# EAGLE board badge2 - multi (EAGLE 8.7.0), part 1 of 5
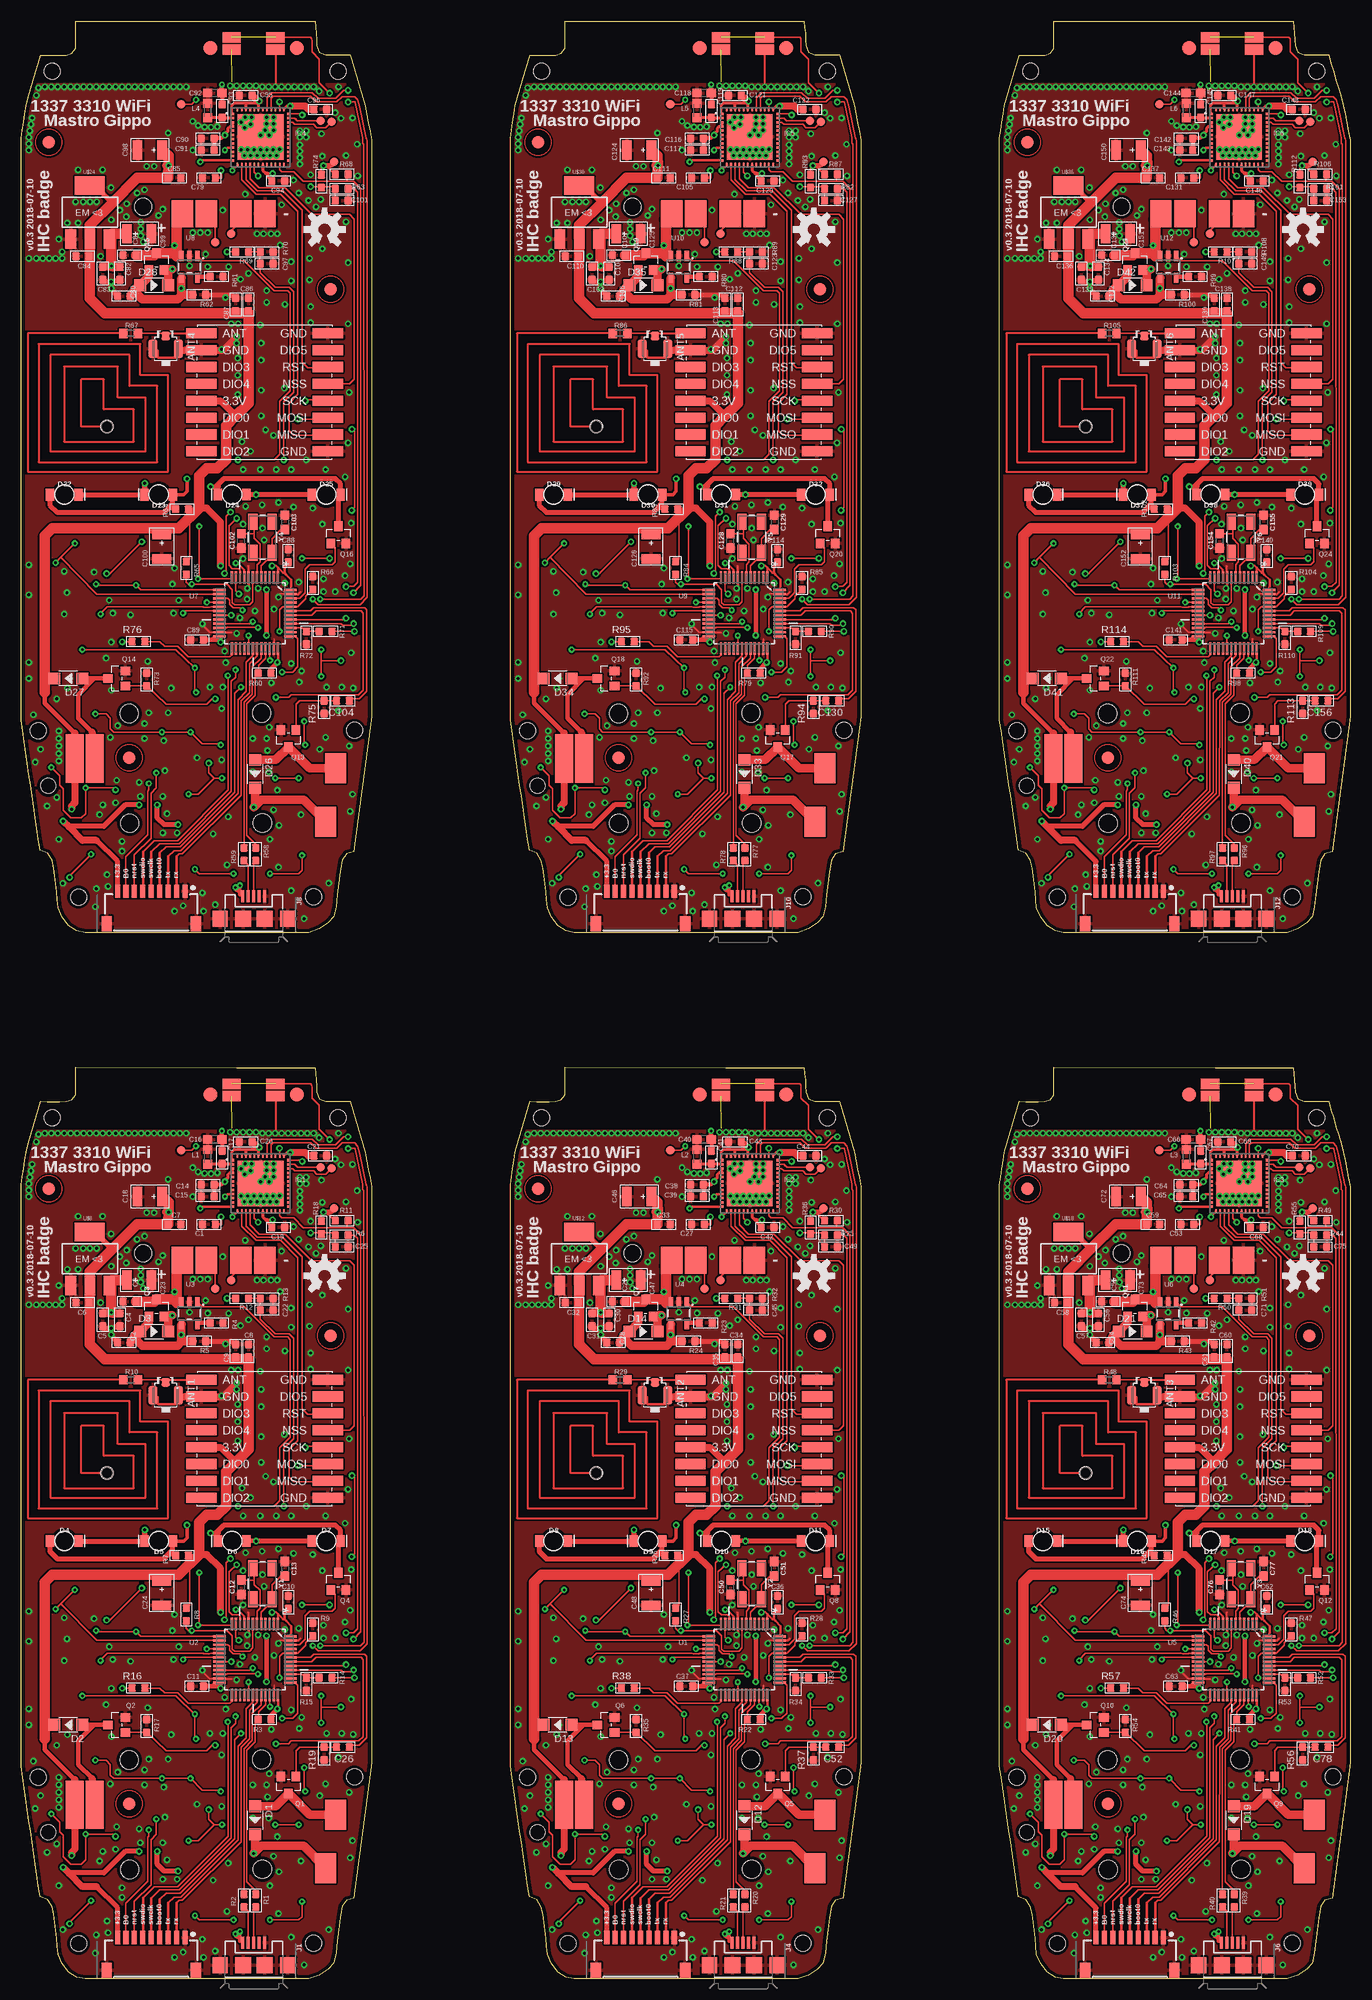
[diagram p0: board, top side]
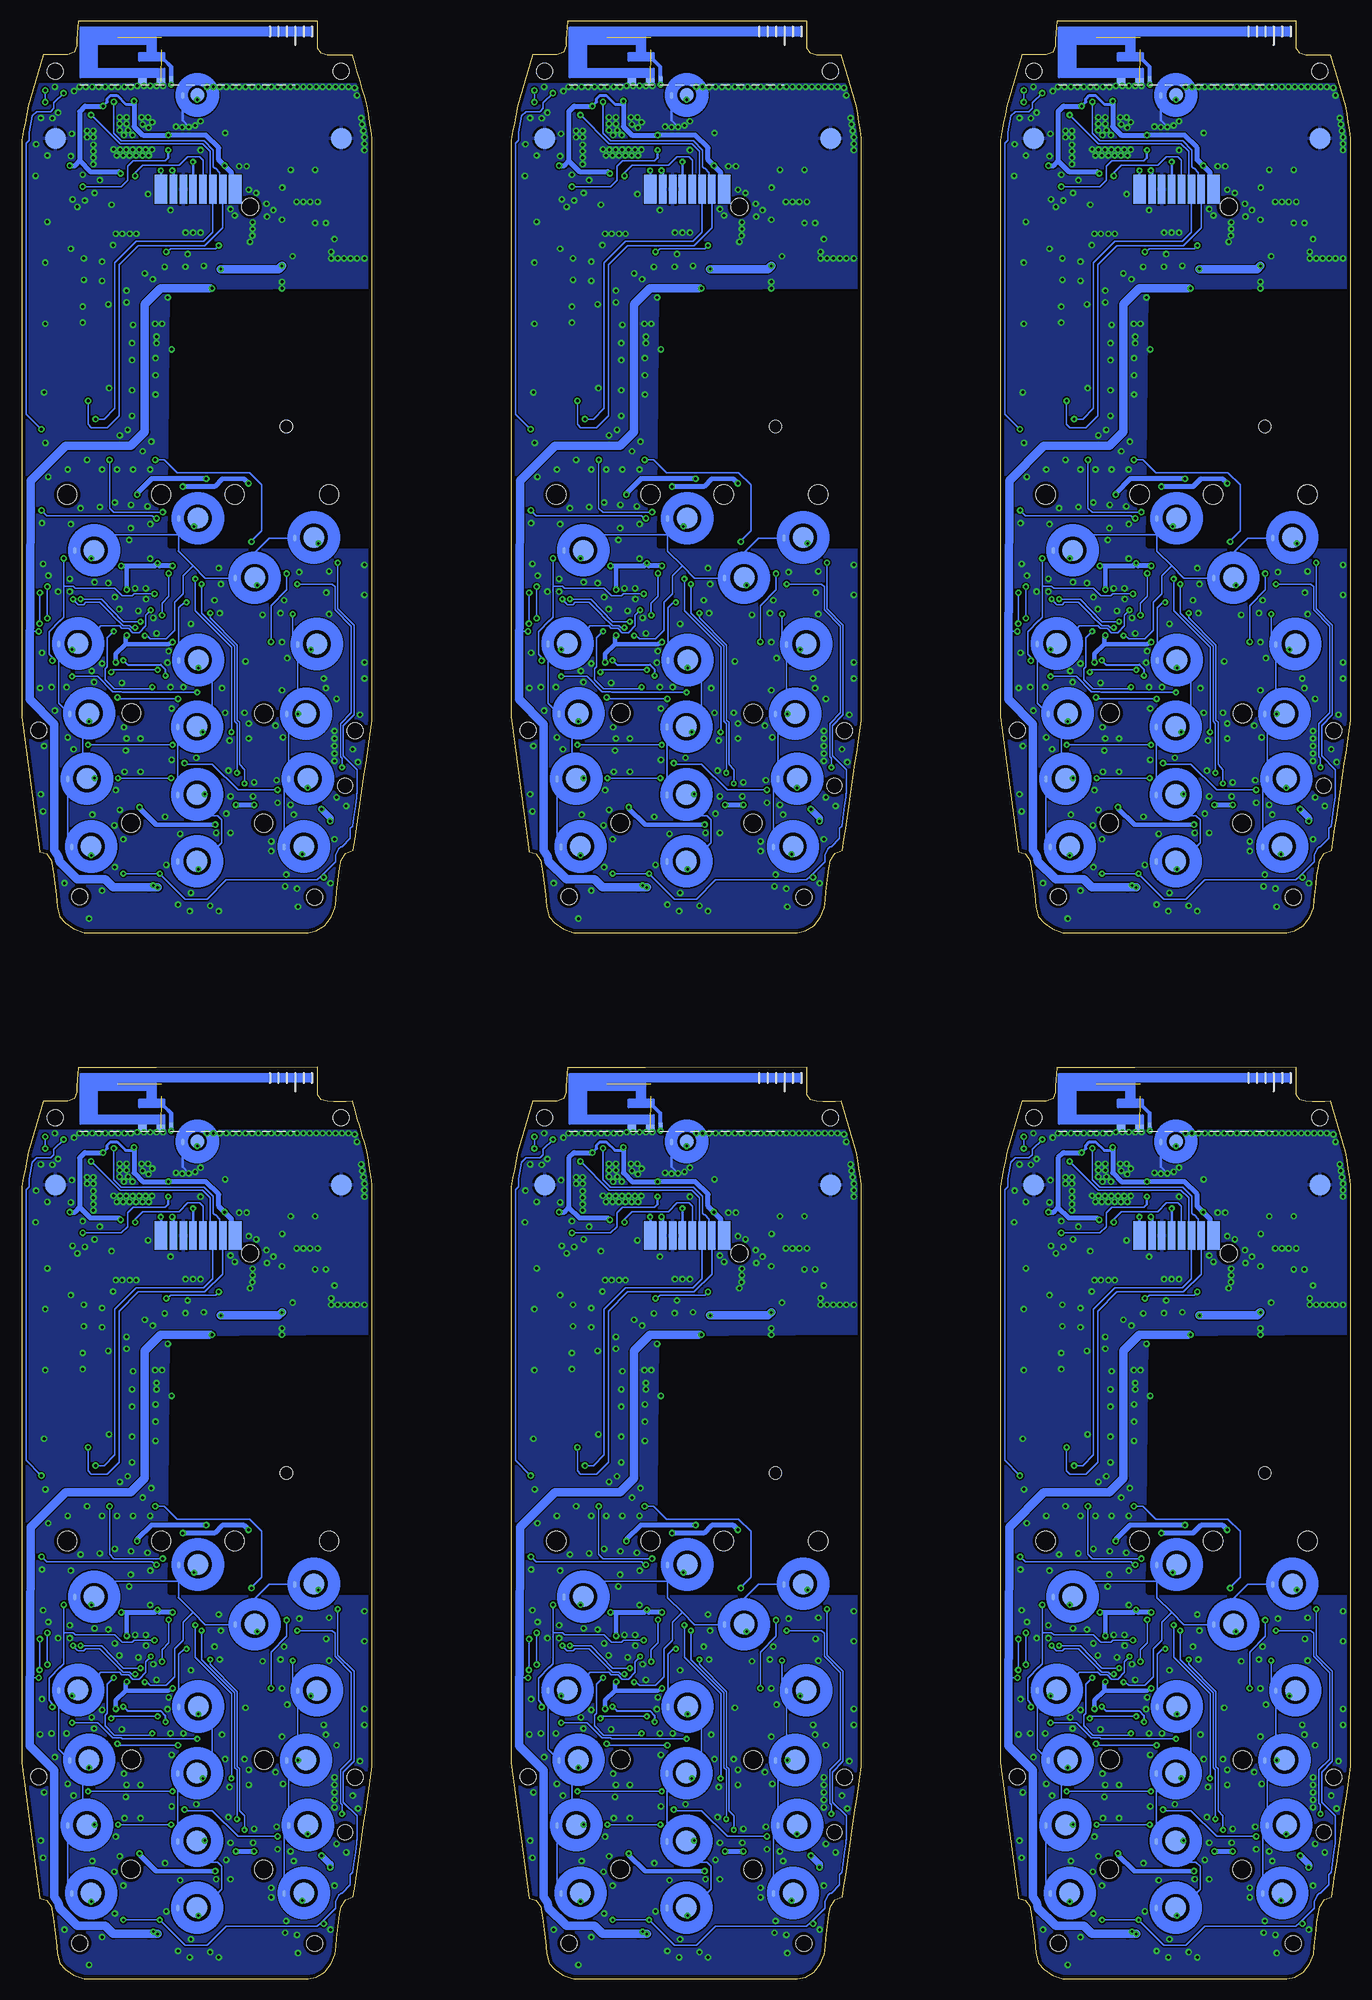
[diagram p1: board, bottom side, seen from below]

Size 157.55 x 232 mm. Coordinates in mm from the lower left corner, seen from the top.
Copper layers (1*16): Top 0.035mm / dielectric 1.5mm / Bottom 0.035mm
Design rules "default *": minimum track width 6mil, minimum drill 0.3mm, track to track 6mil, track to pad 6mil, pad to pad 6mil, via to via 6mil, smd to smd 6mil, copper to edge 15mil, drill to drill 6mil, minimum pad ring 10mil, minimum via ring 8mil, stop-mask expansion 4mil, vias tented up to drill 0mil, thermal gap 10mil

## Footprints (pad centres in the part's own frame; a part is rotated, then mirrored left to right if it is on the bottom)
U-FL3P-SMD-2.6X2.6X1.0MM = smd 1.05 x 1: D -1.524,0 | smd 2.2 x 1.05: GND1 0,1.5; GND2 0,-1.5
C0603 = smd 0.889 x 0.889: 1 0,0.762; 2 0,-0.762
0603 = smd 1.1 x 1: 1 -0.85,0; 2 0.85,0
C0603' = smd 1.1 x 1: 1 -0.85,0; 2 0.85,0
AVX-B = smd 1.143 x 2.286: + -1.46,0; - 1.46,0
SOD-123 = smd 1.397 x 1.397: + -1.651,0; - 1.651,0
LED-1206 = smd 1 x 1.4: A -1.7,0; C 1.7,0
FIDUCIAL-1.5X3 = smd 1.5 x 1.5: 1 0,0
ESP32-PICO-D4_1 = smd 0.475 x 0.3: 1 -3.3,2.75; 2 -3.3,2.25; 3 -3.3,1.75; 4 -3.3,1.25; 5 -3.3,0.75; 6 -3.3,0.25; 7 -3.3,-0.25; 8 -3.3,-0.75; 9 -3.3,-1.25; 10 -3.3,-1.75; 11 -3.3,-2.25; 12 -3.3,-2.75; 25 3.3,-2.75; 26 3.3,-2.25; 27 3.3,-1.75; 28 3.3,-1.25; 29 3.3,-0.75; 30 3.3,-0.25; 31 3.3,0.25; 32 3.3,0.75; 33 3.3,1.25; 34 3.3,1.75; 35 3.3,2.25; 36 3.3,2.75 | smd 0.3 x 0.475: 13 -2.75,-3.3; 14 -2.25,-3.3; 15 -1.75,-3.3; 16 -1.25,-3.3; 17 -0.75,-3.3; 18 -0.25,-3.3; 19 0.25,-3.3; 20 0.75,-3.3; 21 1.25,-3.3; 22 1.75,-3.3; 23 2.25,-3.3; 24 2.75,-3.3; 37 2.75,3.3; 38 2.25,3.3; 39 1.75,3.3; 40 1.25,3.3; 41 0.75,3.3; 42 0.25,3.3; 43 -0.25,3.3; 44 -0.75,3.3; 45 -1.25,3.3; 46 -1.75,3.3; 47 -2.25,3.3; 48 -2.75,3.3 | smd 5.4 x 5.4: 49 -0.006,0.013
USB-MICROB = smd 1.4 x 0.35: D+ -2.65,0; D- -2.65,-0.65; GND -2.65,1.3; ID -2.65,0.65; VBUS -2.65,-1.3 | smd 1.9 x 1.8: MT1 0,-4; MT2 0,4 | smd 1.9 x 1.9: P$1 0,-1.27; P$2 0,1.27
1X01_POGOPIN_HOLE_0.58_DIA = drill 0.9 pad 0.813: 1 0,0 | hole 1.473: 0,0
C0603K = smd 1.05 x 1.08: 1 -0.875,0; 2 0.875,0
SOT-23 = smd 1.016 x 1.143: 1 -0.889,-1.016; 2 0.889,-1.016; 3 0,1.016
R0603 = smd 0.889 x 0.889: 1 0,0.762; 2 0,-0.762
R0603' = smd 1 x 1.1: 1 -0.85,0; 2 0.85,0
PAD.03X.04 = smd 1.016 x 1.016: P$1 0,0
QFP50P900X900X160-48N = smd 1.473 x 0.279: 1 -4.216,2.743; 2 -4.216,2.261; 3 -4.216,1.753; 4 -4.216,1.245; 5 -4.216,0.762; 6 -4.216,0.254; 7 -4.216,-0.254; 8 -4.216,-0.762; 9 -4.216,-1.245; 10 -4.216,-1.753; 11 -4.216,-2.261; 12 -4.216,-2.743; 25 4.216,-2.743; 26 4.216,-2.261; 27 4.216,-1.753; 28 4.216,-1.245; 29 4.216,-0.762; 30 4.216,-0.254; 31 4.216,0.254; 32 4.216,0.762; 33 4.216,1.245; 34 4.216,1.753; 35 4.216,2.261; 36 4.216,2.743 | smd 0.279 x 1.473: 13 -2.743,-4.216; 14 -2.261,-4.216; 15 -1.753,-4.216; 16 -1.245,-4.216; 17 -0.762,-4.216; 18 -0.254,-4.216; 19 0.254,-4.216; 20 0.762,-4.216; 21 1.245,-4.216; 22 1.753,-4.216; 23 2.261,-4.216; 24 2.743,-4.216; 37 2.743,4.216; 38 2.261,4.216; 39 1.753,4.216; 40 1.245,4.216; 41 0.762,4.216; 42 0.254,4.216; 43 -0.254,4.216; 44 -0.762,4.216; 45 -1.245,4.216; 46 -1.753,4.216; 47 -2.261,4.216; 48 -2.743,4.216
SOT23-5 = smd 0.55 x 1.2: 1 -0.95,-1.3; 2 0,-1.3; 3 0.95,-1.3; 4 0.95,1.3; 5 -0.95,1.3
3310LCD = smd 1.651 x 1.651 bottom: ANTG 8.839,104.826; ANTP 19.126,104.826 | smd 2.5 x 2.5: B0I 20.79,8.442; B1I 6.69,34.242; B2I 20.94,32.292; B3I 34.99,34.192; B4I 7.99,25.942; B5I 20.79,24.392; B6I 33.69,25.942; B7I 7.74,18.242; B8I 20.79,16.342; B9I 33.94,18.242; BAI 8.24,10.192; BCI 8.59,45.292; BDI 27.64,42.042; BMI 20.89,49.092; BSI 33.44,10.192; BUI 34.64,46.792; G1 3.99,94.092; G2 37.89,94.092 | smd 0.406 x 0.813: B0O 18.49,8.392; B1O 4.39,34.192; B2O 18.64,32.242; B3O 32.69,34.142; B4O 5.69,25.892; B5O 18.49,24.342; B6O 31.39,25.892; B7O 5.44,18.192; B8O 18.49,16.292; B9O 31.64,18.192; BAO 5.94,10.142; BCO 6.29,45.242; BDO 25.34,41.992; BMO 18.59,49.042; BSO 31.14,10.142; BUO 32.34,46.742; SPK2 19.066,99.191 | smd 2.54 x 3.175 bottom: B_SI 19.583,85.166; BATT+ 22.454,85.166; BATT- 12.649,85.166; BTEMP 15.519,85.166 | smd 2.489 x 3.556 bottom: BUZ1 4.267,19.456; BUZ2 5.436,13.132 | smd 2.134 x 5.715 bottom: MOT1 32.842,20.625; MOT2 35.179,20.625 | smd 1.5 x 3.429: P$1 16.524,88.092; P$8 25.302,88.092 | smd 0.889 x 3.429: P$2 17.992,88.092; P$3 19.16,88.092; P$4 20.329,88.092; P$5 21.497,88.092; P$6 22.666,88.092; P$7 23.834,88.092 | smd 2.15 x 1.25 bottom: PW1A 11.409,106.061; PW1B 16.609,106.061; PW2A 11.409,104.615; PW2B 16.609,104.615 | smd 1.651 x 1.651: SPK1 20.828,99.238 | hole 1.905: 37.885,102.041; 3.985,102.041; 34.735,4.191; 6.885,4.241; 2.035,23.941; 39.535,23.891 | hole 2: 27.09,85.992 | hole 2.3: 5.39,51.892; 16.54,51.892; 25.24,51.892; 36.44,51.892 | hole 1.8: 38.34,17.392 | hole 2.2: 13.04,25.992; 28.74,25.942; 28.69,12.942; 12.94,12.992
WIRELESS-LORA-RFM95W#SMD = smd 3.6 x 1.2: A1 -7.5,7; A2 -7.5,5; A3 -7.5,3; A4 -7.5,1; A5 -7.5,-1; A6 -7.5,-3; A7 -7.5,-5; A8 -7.5,-7; B1 7.5,7; B2 7.5,5; B3 7.5,3; B4 7.5,1; B5 7.5,-1; B6 7.5,-3; B7 7.5,-5; B8 7.5,-7
DN007+2 = smd 0.46 x 1: FEED 2.22,-2.8 | smd 1.01 x 0.74: GND -1.16,-2.93; GND@1 1.035,-2.93
JST-09-SMD-HORI-1.0MM = smd 0.6 x 1.55: 1 -5.81,-4.775; 2 -4.81,-4.775; 3 -3.81,-4.775; 4 -2.81,-4.775; 5 -1.81,-4.775; 6 -0.81,-4.775; 7 0.19,-4.775; 8 1.19,-4.775; 9 2.19,-4.775 | smd 1.2 x 1.8: M1 -7.11,-0.9; M2 3.49,-0.9
SOT-223 = smd 1.27 x 2.286: 1 -2.286,-3.175; 2 0,-3.175; 3 2.286,-3.175 | smd 3.556 x 2.159: TER 0,3.175
CRYSTAL-SMD-5X3.2-4PAD = smd 1.9 x 1.1: 1 -1.85,-1.15; 2 1.85,-1.15; 3 1.85,1.15; 4 -1.85,1.15

## Placement (x,y rotation side)
ANT1  U-FL  [U-FL3P-SMD-2.6X2.6X1.0MM]  17.15,69.17 270 top
ANT2  U-FL  [U-FL3P-SMD-2.6X2.6X1.0MM]  75.15,69.17 270 top
ANT3  U-FL  [U-FL3P-SMD-2.6X2.6X1.0MM]  133.15,69.17 270 top
ANT4  U-FL  [U-FL3P-SMD-2.6X2.6X1.0MM]  17.15,193.17 270 top
ANT5  U-FL  [U-FL3P-SMD-2.6X2.6X1.0MM]  75.15,193.17 270 top
ANT6  U-FL  [U-FL3P-SMD-2.6X2.6X1.0MM]  133.15,193.17 270 top
C1  4.7uf  [C0603]  22.26,89.41 90 top
C2  4.7uf  [C0603]  12.2,75.41 270 top
C3  4.7uf  [C0603]  12.86,80.27 270 top
C4  4.7uf  [C0603]  11.72,78.11 0 top
C5  100nf  [C0603]  9.68,78.11 0 top
C6  4.7uf  [C0603]  7.27,80.14 270 top
C7  4.7uf  [C0603]  18.19,89.41 90 top
C8  4.7uf  [C0603]  26.96,74.42 180 top
C9  100nf  [C0603]  25.43,74.42 180 top
C10  100nf  [C0603]  31.67,44.63 180 top
C11  100nf  [C0603]  20.86,34.67 270 top
C12  18pF  [0603]  26.09,46.41 90 top
C13  18pF  [0603]  31.29,48.6 270 top
C14  10uf  [C0603]  22.13,94.11 270 top
C15  100nf  [C0603]  22.13,92.71 270 top
C16  2.7p  [C0603']  22.97,99.47 180 top
C17  4.7PF  [C0603]  23.83,97.36 0 top
C18  22uf  [AVX-B]  15.27,92.71 180 top
C19  100nf  [C0603]  30.49,89.06 90 top
C20  100nf  [C0603]  26.63,99.19 270 top
C21  4.7uf  [C0603]  35.47,97.54 90 top
C22  100nf  [C0603]  29.12,79.25 90 top
C23  22uf  [AVX-B]  14,82.81 0 top
C24  22uf  [AVX-B]  16.67,45.72 270 top
C25  100nf  [C0603]  38.01,86.74 90 top
C26  4.7uf  [C0603]  38.16,27.46 270 top
C27  4.7uf  [C0603]  80.26,89.41 90 top
C28  4.7uf  [C0603]  70.2,75.41 270 top
C29  4.7uf  [C0603]  70.86,80.27 270 top
C30  4.7uf  [C0603]  69.72,78.11 0 top
C31  100nf  [C0603]  67.68,78.11 0 top
C32  4.7uf  [C0603]  65.27,80.14 270 top
C33  4.7uf  [C0603]  76.19,89.41 90 top
C34  4.7uf  [C0603]  84.96,74.42 180 top
C35  100nf  [C0603]  83.43,74.42 180 top
C36  100nf  [C0603]  89.67,44.63 180 top
C37  100nf  [C0603]  78.86,34.67 270 top
C38  10uf  [C0603]  80.13,94.11 270 top
C39  100nf  [C0603]  80.13,92.71 270 top
C40  2.7p  [C0603']  80.97,99.47 180 top
C41  4.7PF  [C0603]  81.83,97.36 0 top
C42  100nf  [C0603]  88.49,89.06 90 top
C43  100nf  [C0603]  84.63,99.19 270 top
C44  4.7uf  [C0603]  93.47,97.54 90 top
C45  100nf  [C0603]  87.12,79.25 90 top
C46  22uf  [AVX-B]  73.27,92.71 180 top
C47  22uf  [AVX-B]  72,82.81 0 top
C48  22uf  [AVX-B]  74.67,45.72 270 top
C49  100nf  [C0603]  96.01,86.74 90 top
C50  18pF  [0603]  84.09,46.41 90 top
C51  18pF  [0603]  89.29,48.6 270 top
C52  4.7uf  [C0603]  96.16,27.46 270 top
C53  4.7uf  [C0603]  138.26,89.41 90 top
C54  4.7uf  [C0603]  128.2,75.41 270 top
C55  4.7uf  [C0603]  128.86,80.27 270 top
C56  4.7uf  [C0603]  127.72,78.11 0 top
C57  100nf  [C0603]  125.68,78.11 0 top
C58  4.7uf  [C0603]  123.27,80.14 270 top
C59  4.7uf  [C0603]  134.19,89.41 90 top
C60  4.7uf  [C0603]  142.96,74.42 180 top
C61  100nf  [C0603]  141.43,74.42 180 top
C62  100nf  [C0603]  147.67,44.63 180 top
C63  100nf  [C0603]  136.86,34.67 270 top
C64  10uf  [C0603]  138.13,94.11 270 top
C65  100nf  [C0603]  138.13,92.71 270 top
C66  2.7p  [C0603']  138.97,99.47 180 top
C67  4.7PF  [C0603]  139.83,97.36 0 top
C68  100nf  [C0603]  146.49,89.06 90 top
C69  100nf  [C0603]  142.63,99.19 270 top
C70  4.7uf  [C0603]  151.47,97.54 90 top
C71  100nf  [C0603]  145.12,79.25 90 top
C72  22uf  [AVX-B]  131.27,92.71 180 top
C73  22uf  [AVX-B]  130,82.81 0 top
C74  22uf  [AVX-B]  132.67,45.72 270 top
C75  100nf  [C0603]  154.01,86.74 90 top
C76  18pF  [0603]  142.09,46.41 90 top
C77  18pF  [0603]  147.29,48.6 270 top
C78  4.7uf  [C0603]  154.16,27.46 270 top
C79  4.7uf  [C0603]  22.26,213.41 90 top
C80  4.7uf  [C0603]  12.2,199.41 270 top
C81  4.7uf  [C0603]  12.86,204.27 270 top
C82  4.7uf  [C0603]  11.72,202.11 0 top
C83  100nf  [C0603]  9.68,202.11 0 top
C84  4.7uf  [C0603]  7.27,204.14 270 top
C85  4.7uf  [C0603]  18.19,213.41 90 top
C86  4.7uf  [C0603]  26.96,198.42 180 top
C87  100nf  [C0603]  25.43,198.42 180 top
C88  100nf  [C0603]  31.67,168.63 180 top
C89  100nf  [C0603]  20.86,158.67 270 top
C90  10uf  [C0603]  22.13,218.11 270 top
C91  100nf  [C0603]  22.13,216.71 270 top
C92  2.7p  [C0603']  22.97,223.47 180 top
C93  4.7PF  [C0603]  23.83,221.36 0 top
C94  100nf  [C0603]  30.49,213.06 90 top
C95  100nf  [C0603]  26.63,223.19 270 top
C96  4.7uf  [C0603]  35.47,221.54 90 top
C97  100nf  [C0603]  29.12,203.25 90 top
C98  22uf  [AVX-B]  15.27,216.71 180 top
C99  22uf  [AVX-B]  14,206.81 0 top
C100  22uf  [AVX-B]  16.67,169.72 270 top
C101  100nf  [C0603]  38.01,210.74 90 top
C102  18pF  [0603]  26.09,170.41 90 top
C103  18pF  [0603]  31.29,172.6 270 top
C104  4.7uf  [C0603]  38.16,151.46 270 top
C105  4.7uf  [C0603]  80.26,213.41 90 top
C106  4.7uf  [C0603]  70.2,199.41 270 top
C107  4.7uf  [C0603]  70.86,204.27 270 top
C108  4.7uf  [C0603]  69.72,202.11 0 top
C109  100nf  [C0603]  67.68,202.11 0 top
C110  4.7uf  [C0603]  65.27,204.14 270 top
C111  4.7uf  [C0603]  76.19,213.41 90 top
C112  4.7uf  [C0603]  84.96,198.42 180 top
C113  100nf  [C0603]  83.43,198.42 180 top
C114  100nf  [C0603]  89.67,168.63 180 top
C115  100nf  [C0603]  78.86,158.67 270 top
C116  10uf  [C0603]  80.13,218.11 270 top
C117  100nf  [C0603]  80.13,216.71 270 top
C118  2.7p  [C0603']  80.97,223.47 180 top
C119  4.7PF  [C0603]  81.83,221.36 0 top
C120  100nf  [C0603]  88.49,213.06 90 top
C121  100nf  [C0603]  84.63,223.19 270 top
C122  4.7uf  [C0603]  93.47,221.54 90 top
C123  100nf  [C0603]  87.12,203.25 90 top
C124  22uf  [AVX-B]  73.27,216.71 180 top
C125  22uf  [AVX-B]  72,206.81 0 top
C126  22uf  [AVX-B]  74.67,169.72 270 top
C127  100nf  [C0603]  96.01,210.74 90 top
C128  18pF  [0603]  84.09,170.41 90 top
C129  18pF  [0603]  89.29,172.6 270 top
C130  4.7uf  [C0603]  96.16,151.46 270 top
C131  4.7uf  [C0603]  138.26,213.41 90 top
C132  4.7uf  [C0603]  128.2,199.41 270 top
C133  4.7uf  [C0603]  128.86,204.27 270 top
C134  4.7uf  [C0603]  127.72,202.11 0 top
C135  100nf  [C0603]  125.68,202.11 0 top
C136  4.7uf  [C0603]  123.27,204.14 270 top
C137  4.7uf  [C0603]  134.19,213.41 90 top
C138  4.7uf  [C0603]  142.96,198.42 180 top
C139  100nf  [C0603]  141.43,198.42 180 top
C140  100nf  [C0603]  147.67,168.63 180 top
C141  100nf  [C0603]  136.86,158.67 270 top
C142  10uf  [C0603]  138.13,218.11 270 top
C143  100nf  [C0603]  138.13,216.71 270 top
C144  2.7p  [C0603']  138.97,223.47 180 top
C145  4.7PF  [C0603]  139.83,221.36 0 top
C146  100nf  [C0603]  146.49,213.06 90 top
C147  100nf  [C0603]  142.63,223.19 270 top
C148  4.7uf  [C0603]  151.47,221.54 90 top
C149  100nf  [C0603]  145.12,203.25 90 top
C150  22uf  [AVX-B]  131.27,216.71 180 top
C151  22uf  [AVX-B]  130,206.81 0 top
C152  22uf  [AVX-B]  132.67,169.72 270 top
C153  100nf  [C0603]  154.01,210.74 90 top
C154  18pF  [0603]  142.09,170.41 90 top
C155  18pF  [0603]  147.29,172.6 270 top
C156  4.7uf  [C0603]  154.16,151.46 270 top
D1  NRVTS245ESFT3G  [SOD-123]  27.74,18.8 270 top
D2  NRVTS245ESFT3G  [SOD-123]  5.59,30.1 180 top
D3  NRVTS245ESFT3G  [SOD-123]  15.78,76.71 0 top
D4  LED-BOTTOM-1206  [LED-1206]  5.12,51.88 0 top
D5  LED-BOTTOM-1206  [LED-1206]  16.32,51.88 180 top
D6  LED-BOTTOM-1206  [LED-1206]  25.02,51.89 180 top
D7  LED-BOTTOM-1206  [LED-1206]  36.18,51.88 0 top
D8  LED-BOTTOM-1206  [LED-1206]  63.12,51.88 0 top
D9  LED-BOTTOM-1206  [LED-1206]  74.32,51.88 180 top
D10  LED-BOTTOM-1206  [LED-1206]  83.02,51.89 180 top
D11  LED-BOTTOM-1206  [LED-1206]  94.18,51.88 0 top
D12  NRVTS245ESFT3G  [SOD-123]  85.74,18.8 270 top
D13  NRVTS245ESFT3G  [SOD-123]  63.59,30.1 180 top
D14  NRVTS245ESFT3G  [SOD-123]  73.78,76.71 0 top
D15  LED-BOTTOM-1206  [LED-1206]  121.12,51.88 0 top
D16  LED-BOTTOM-1206  [LED-1206]  132.32,51.88 180 top
D17  LED-BOTTOM-1206  [LED-1206]  141.02,51.89 180 top
D18  LED-BOTTOM-1206  [LED-1206]  152.18,51.88 0 top
D19  NRVTS245ESFT3G  [SOD-123]  143.74,18.8 270 top
D20  NRVTS245ESFT3G  [SOD-123]  121.59,30.1 180 top
D21  NRVTS245ESFT3G  [SOD-123]  131.78,76.71 0 top
D22  LED-BOTTOM-1206  [LED-1206]  5.12,175.88 0 top
D23  LED-BOTTOM-1206  [LED-1206]  16.32,175.88 180 top
D24  LED-BOTTOM-1206  [LED-1206]  25.02,175.89 180 top
D25  LED-BOTTOM-1206  [LED-1206]  36.18,175.88 0 top
D26  NRVTS245ESFT3G  [SOD-123]  27.74,142.8 270 top
D27  NRVTS245ESFT3G  [SOD-123]  5.59,154.1 180 top
D28  NRVTS245ESFT3G  [SOD-123]  15.78,200.71 0 top
D29  LED-BOTTOM-1206  [LED-1206]  63.12,175.88 0 top
D30  LED-BOTTOM-1206  [LED-1206]  74.32,175.88 180 top
D31  LED-BOTTOM-1206  [LED-1206]  83.02,175.89 180 top
D32  LED-BOTTOM-1206  [LED-1206]  94.18,175.88 0 top
D33  NRVTS245ESFT3G  [SOD-123]  85.74,142.8 270 top
D34  NRVTS245ESFT3G  [SOD-123]  63.59,154.1 180 top
D35  NRVTS245ESFT3G  [SOD-123]  73.78,200.71 0 top
D36  LED-BOTTOM-1206  [LED-1206]  121.12,175.88 0 top
D37  LED-BOTTOM-1206  [LED-1206]  132.32,175.88 180 top
D38  LED-BOTTOM-1206  [LED-1206]  141.02,175.89 180 top
D39  LED-BOTTOM-1206  [LED-1206]  152.18,175.88 0 top
D40  NRVTS245ESFT3G  [SOD-123]  143.74,142.8 270 top
D41  NRVTS245ESFT3G  [SOD-123]  121.59,154.1 180 top
D42  NRVTS245ESFT3G  [SOD-123]  131.78,200.71 0 top
FID1  FIDUCIAL1.5X3  [FIDUCIAL-1.5X3]  12.83,20.73 0 top
FID2  FIDUCIAL1.5X3  [FIDUCIAL-1.5X3]  3.28,93.63 0 top
FID3  FIDUCIAL1.5X3  [FIDUCIAL-1.5X3]  36.71,76.23 0 top
FID4  FIDUCIAL1.5X3  [FIDUCIAL-1.5X3]  70.83,20.73 0 top
FID5  FIDUCIAL1.5X3  [FIDUCIAL-1.5X3]  61.28,93.63 0 top
FID6  FIDUCIAL1.5X3  [FIDUCIAL-1.5X3]  94.71,76.23 0 top
FID7  FIDUCIAL1.5X3  [FIDUCIAL-1.5X3]  128.83,20.73 0 top
FID8  FIDUCIAL1.5X3  [FIDUCIAL-1.5X3]  119.28,93.63 0 top
FID9  FIDUCIAL1.5X3  [FIDUCIAL-1.5X3]  152.71,76.23 0 top
FID10  FIDUCIAL1.5X3  [FIDUCIAL-1.5X3]  12.83,144.73 0 top
FID11  FIDUCIAL1.5X3  [FIDUCIAL-1.5X3]  3.28,217.63 0 top
FID12  FIDUCIAL1.5X3  [FIDUCIAL-1.5X3]  36.71,200.23 0 top
FID13  FIDUCIAL1.5X3  [FIDUCIAL-1.5X3]  70.83,144.73 0 top
FID14  FIDUCIAL1.5X3  [FIDUCIAL-1.5X3]  61.28,217.63 0 top
FID15  FIDUCIAL1.5X3  [FIDUCIAL-1.5X3]  94.71,200.23 0 top
FID16  FIDUCIAL1.5X3  [FIDUCIAL-1.5X3]  128.83,144.73 0 top
FID17  FIDUCIAL1.5X3  [FIDUCIAL-1.5X3]  119.28,217.63 0 top
FID18  FIDUCIAL1.5X3  [FIDUCIAL-1.5X3]  152.71,200.23 0 top
IC1  ESP32-PICO-D4  [ESP32-PICO-D4_1]  28.4,94.26 0 top
IC2  ESP32-PICO-D4  [ESP32-PICO-D4_1]  86.4,94.26 0 top
IC3  ESP32-PICO-D4  [ESP32-PICO-D4_1]  144.4,94.26 0 top
IC4  ESP32-PICO-D4  [ESP32-PICO-D4_1]  28.4,218.26 0 top
IC5  ESP32-PICO-D4  [ESP32-PICO-D4_1]  86.4,218.26 0 top
IC6  ESP32-PICO-D4  [ESP32-PICO-D4_1]  144.4,218.26 0 top
J1  [USB-MICROB]  27.59,1.63 270 top
J2  [1X01_POGOPIN_HOLE_0.58_DIA]  68.19,59.95 0 top
J3  [1X01_POGOPIN_HOLE_0.58_DIA]  10.19,59.95 0 top
J4  [USB-MICROB]  85.59,1.63 270 top
J5  [1X01_POGOPIN_HOLE_0.58_DIA]  126.19,59.95 0 top
J6  [USB-MICROB]  143.59,1.63 270 top
J7  [1X01_POGOPIN_HOLE_0.58_DIA]  10.19,183.95 0 top
J8  [USB-MICROB]  27.59,125.63 270 top
J9  [1X01_POGOPIN_HOLE_0.58_DIA]  68.19,183.95 0 top
J10  [USB-MICROB]  85.59,125.63 270 top
J11  [1X01_POGOPIN_HOLE_0.58_DIA]  126.19,183.95 0 top
J12  [USB-MICROB]  143.59,125.63 270 top
L1  1.6nH  [C0603K]  22.13,97.41 90 top
L2  1.6nH  [C0603K]  80.13,97.41 90 top
L3  1.6nH  [C0603K]  138.13,97.41 90 top
L4  1.6nH  [C0603K]  22.13,221.41 90 top
L5  1.6nH  [C0603K]  80.13,221.41 90 top
L6  1.6nH  [C0603K]  138.13,221.41 90 top
Q1  CJ2302  [SOT-23]  31.71,22.99 180 top
Q2  CJ2302  [SOT-23]  11.34,30.1 90 top
Q3  FDN340P  [SOT-23]  16.03,79.5 0 top
Q4  CJ2302  [SOT-23]  37.62,47.12 0 top
Q5  CJ2302  [SOT-23]  89.71,22.99 180 top
Q6  CJ2302  [SOT-23]  69.34,30.1 90 top
Q7  FDN340P  [SOT-23]  74.03,79.5 0 top
Q8  CJ2302  [SOT-23]  95.62,47.12 0 top
Q9  CJ2302  [SOT-23]  147.71,22.99 180 top
Q10  CJ2302  [SOT-23]  127.34,30.1 90 top
Q11  FDN340P  [SOT-23]  132.03,79.5 0 top
Q12  CJ2302  [SOT-23]  153.62,47.12 0 top
Q13  CJ2302  [SOT-23]  31.71,146.99 180 top
Q14  CJ2302  [SOT-23]  11.34,154.1 90 top
Q15  FDN340P  [SOT-23]  16.03,203.5 0 top
Q16  CJ2302  [SOT-23]  37.62,171.12 0 top
Q17  CJ2302  [SOT-23]  89.71,146.99 180 top
Q18  CJ2302  [SOT-23]  69.34,154.1 90 top
Q19  FDN340P  [SOT-23]  74.03,203.5 0 top
Q20  CJ2302  [SOT-23]  95.62,171.12 0 top
Q21  CJ2302  [SOT-23]  147.71,146.99 180 top
Q22  CJ2302  [SOT-23]  127.34,154.1 90 top
Q23  FDN340P  [SOT-23]  132.03,203.5 0 top
Q24  CJ2302  [SOT-23]  153.62,171.12 0 top
R1  22R  [R0603]  27.82,9.27 180 top
R2  22R  [R0603]  26.42,9.27 180 top
R3  1.5K  [R0603]  28.86,30.74 90 top
R4  2K  [R0603]  23.17,77.73 270 top
R5  10K  [R0603]  21.11,75.57 270 top
R6  22R  [R0603]  38.01,88.14 90 top
R7  22R  [R0603]  19.08,50.17 90 top
R8  10K 1/10W  [R0603]  19.59,43.18 180 top
R9  10K  [R0603]  34.58,41.4 0 top
R10  0  [R0603']  12.99,70.99 0 top
R11  10K  [R0603]  38.01,89.85 90 top
R12  100K 1/10W  [R0603]  26.19,80.65 270 top
R13  100K 1/10W  [R0603]  29.12,80.65 270 top
R14  100K 1/10W  [R0603]  36.1,35.69 90 top
R15  100K 1/10W  [R0603]  33.81,34.93 180 top
R16  10K  [R0603]  13.93,34.47 270 top
R17  100K 1/10W  [R0603]  14.89,29.97 0 top
R18  10K  [R0603]  35.59,89.03 180 top
R19  10K  [R0603]  35.92,26.7 0 top
R20  22R  [R0603]  85.82,9.27 180 top
R21  22R  [R0603]  84.42,9.27 180 top
R22  1.5K  [R0603]  86.86,30.74 90 top
R23  2K  [R0603]  81.17,77.73 270 top
R24  10K  [R0603]  79.11,75.57 270 top
R25  22R  [R0603]  96.01,88.14 90 top
R26  22R  [R0603]  77.08,50.17 90 top
R27  10K 1/10W  [R0603]  77.59,43.18 180 top
R28  10K  [R0603]  92.58,41.4 0 top
R29  0  [R0603']  70.99,70.99 0 top
R30  10K  [R0603]  96.01,89.85 90 top
R31  100K 1/10W  [R0603]  84.19,80.65 270 top
R32  100K 1/10W  [R0603]  87.12,80.65 270 top
R33  100K 1/10W  [R0603]  94.1,35.69 90 top
R34  100K 1/10W  [R0603]  91.81,34.93 180 top
R35  100K 1/10W  [R0603]  72.89,29.97 0 top
R36  10K  [R0603]  93.59,89.03 180 top
R37  10K  [R0603]  93.92,26.7 0 top
R38  10K  [R0603]  71.93,34.47 270 top
R39  22R  [R0603]  143.82,9.27 180 top
R40  22R  [R0603]  142.42,9.27 180 top
R41  1.5K  [R0603]  144.86,30.74 90 top
R42  2K  [R0603]  139.17,77.73 270 top
R43  10K  [R0603]  137.11,75.57 270 top
R44  22R  [R0603]  154.01,88.14 90 top
R45  22R  [R0603]  135.08,50.17 90 top
R46  10K 1/10W  [R0603]  135.59,43.18 180 top
R47  10K  [R0603]  150.58,41.4 0 top
R48  0  [R0603']  128.99,70.99 0 top
R49  10K  [R0603]  154.01,89.85 90 top
R50  100K 1/10W  [R0603]  142.19,80.65 270 top
R51  100K 1/10W  [R0603]  145.12,80.65 270 top
R52  100K 1/10W  [R0603]  152.1,35.69 90 top
R53  100K 1/10W  [R0603]  149.81,34.93 180 top
R54  100K 1/10W  [R0603]  130.89,29.97 0 top
R55  10K  [R0603]  151.59,89.03 180 top
R56  10K  [R0603]  151.92,26.7 0 top
R57  10K  [R0603]  129.93,34.47 270 top
R58  22R  [R0603]  27.82,133.27 180 top
R59  22R  [R0603]  26.42,133.27 180 top
R60  1.5K  [R0603]  28.86,154.74 90 top
R61  2K  [R0603]  23.17,201.73 270 top
R62  10K  [R0603]  21.11,199.57 270 top
R63  22R  [R0603]  38.01,212.14 90 top
R64  22R  [R0603]  19.08,174.17 90 top
R65  10K 1/10W  [R0603]  19.59,167.18 180 top
R66  10K  [R0603]  34.58,165.4 0 top
R67  0  [R0603']  12.99,194.99 0 top
R68  10K  [R0603]  38.01,213.85 90 top
R69  100K 1/10W  [R0603]  26.19,204.65 270 top
R70  100K 1/10W  [R0603]  29.12,204.65 270 top
R71  100K 1/10W  [R0603]  36.1,159.69 90 top
R72  100K 1/10W  [R0603]  33.81,158.93 180 top
R73  100K 1/10W  [R0603]  14.89,153.97 0 top
R74  10K  [R0603]  35.59,213.03 180 top
R75  10K  [R0603]  35.92,150.7 0 top
R76  10K  [R0603]  13.93,158.47 270 top
R77  22R  [R0603]  85.82,133.27 180 top
R78  22R  [R0603]  84.42,133.27 180 top
R79  1.5K  [R0603]  86.86,154.74 90 top
R80  2K  [R0603]  81.17,201.73 270 top
R81  10K  [R0603]  79.11,199.57 270 top
R82  22R  [R0603]  96.01,212.14 90 top
R83  22R  [R0603]  77.08,174.17 90 top
R84  10K 1/10W  [R0603]  77.59,167.18 180 top
R85  10K  [R0603]  92.58,165.4 0 top
R86  0  [R0603']  70.99,194.99 0 top
R87  10K  [R0603]  96.01,213.85 90 top
R88  100K 1/10W  [R0603]  84.19,204.65 270 top
R89  100K 1/10W  [R0603]  87.12,204.65 270 top
R90  100K 1/10W  [R0603]  94.1,159.69 90 top
R91  100K 1/10W  [R0603]  91.81,158.93 180 top
R92  100K 1/10W  [R0603]  72.89,153.97 0 top
R93  10K  [R0603]  93.59,213.03 180 top
R94  10K  [R0603]  93.92,150.7 0 top
R95  10K  [R0603]  71.93,158.47 270 top
R96  22R  [R0603]  143.82,133.27 180 top
R97  22R  [R0603]  142.42,133.27 180 top
R98  1.5K  [R0603]  144.86,154.74 90 top
R99  2K  [R0603]  139.17,201.73 270 top
R100  10K  [R0603]  137.11,199.57 270 top
R101  22R  [R0603]  154.01,212.14 90 top
R102  22R  [R0603]  135.08,174.17 90 top
R103  10K 1/10W  [R0603]  135.59,167.18 180 top
R104  10K  [R0603]  150.58,165.4 0 top
R105  0  [R0603']  128.99,194.99 0 top
R106  10K  [R0603]  154.01,213.85 90 top
R107  100K 1/10W  [R0603]  142.19,204.65 270 top
R108  100K 1/10W  [R0603]  145.12,204.65 270 top
R109  100K 1/10W  [R0603]  152.1,159.69 90 top
R110  100K 1/10W  [R0603]  149.81,158.93 180 top
R111  100K 1/10W  [R0603]  130.89,153.97 0 top
R112  10K  [R0603]  151.59,213.03 180 top
R113  10K  [R0603]  151.92,150.7 0 top
R114  10K  [R0603]  129.93,158.47 270 top
TP1  TEST-POINT3X4  [PAD.03X.04]  36.81,96.09 0 top
TP2  TEST-POINT3X4  [PAD.03X.04]  35.52,96.19 0 top
TP3  TEST-POINT3X4  [PAD.03X.04]  37.12,91.31 0 top
TP4  TEST-POINT3X4  [PAD.03X.04]  24.92,82.81 0 top
TP5  TEST-POINT3X4  [PAD.03X.04]  23.02,81.79 0 top
TP6  TEST-POINT3X4  [PAD.03X.04]  18.96,98.17 0 top
TP7  TEST-POINT3X4  [PAD.03X.04]  94.81,96.09 0 top
TP8  TEST-POINT3X4  [PAD.03X.04]  93.52,96.19 0 top
TP9  TEST-POINT3X4  [PAD.03X.04]  95.12,91.31 0 top
TP10  TEST-POINT3X4  [PAD.03X.04]  82.92,82.81 0 top
TP11  TEST-POINT3X4  [PAD.03X.04]  81.02,81.79 0 top
TP12  TEST-POINT3X4  [PAD.03X.04]  76.96,98.17 0 top
TP13  TEST-POINT3X4  [PAD.03X.04]  152.81,96.09 0 top
TP14  TEST-POINT3X4  [PAD.03X.04]  151.52,96.19 0 top
TP15  TEST-POINT3X4  [PAD.03X.04]  153.12,91.31 0 top
TP16  TEST-POINT3X4  [PAD.03X.04]  140.92,82.81 0 top
TP17  TEST-POINT3X4  [PAD.03X.04]  139.02,81.79 0 top
TP18  TEST-POINT3X4  [PAD.03X.04]  134.96,98.17 0 top
TP19  TEST-POINT3X4  [PAD.03X.04]  36.81,220.09 0 top
TP20  TEST-POINT3X4  [PAD.03X.04]  35.52,220.19 0 top
TP21  TEST-POINT3X4  [PAD.03X.04]  37.12,215.31 0 top
TP22  TEST-POINT3X4  [PAD.03X.04]  24.92,206.81 0 top
TP23  TEST-POINT3X4  [PAD.03X.04]  23.02,205.79 0 top
TP24  TEST-POINT3X4  [PAD.03X.04]  18.96,222.17 0 top
TP25  TEST-POINT3X4  [PAD.03X.04]  94.81,220.09 0 top
TP26  TEST-POINT3X4  [PAD.03X.04]  93.52,220.19 0 top
TP27  TEST-POINT3X4  [PAD.03X.04]  95.12,215.31 0 top
TP28  TEST-POINT3X4  [PAD.03X.04]  82.92,206.81 0 top
TP29  TEST-POINT3X4  [PAD.03X.04]  81.02,205.79 0 top
TP30  TEST-POINT3X4  [PAD.03X.04]  76.96,222.17 0 top
TP31  TEST-POINT3X4  [PAD.03X.04]  152.81,220.09 0 top
TP32  TEST-POINT3X4  [PAD.03X.04]  151.52,220.19 0 top
TP33  TEST-POINT3X4  [PAD.03X.04]  153.12,215.31 0 top
TP34  TEST-POINT3X4  [PAD.03X.04]  140.92,206.81 0 top
TP35  TEST-POINT3X4  [PAD.03X.04]  139.02,205.79 0 top
TP36  TEST-POINT3X4  [PAD.03X.04]  134.96,222.17 0 top
U1  STM32F103CBT6  [QFP50P900X900X160-48N]  85.72,37.85 270 top
U2  STM32F103CBT6  [QFP50P900X900X160-48N]  27.72,37.85 270 top
U3  MCP73831  [SOT23-5]  19.97,78.87 180 top
U4  MCP73831  [SOT23-5]  77.97,78.87 180 top
U5  STM32F103CBT6  [QFP50P900X900X160-48N]  143.72,37.85 270 top
U6  MCP73831  [SOT23-5]  135.97,78.87 180 top
U7  STM32F103CBT6  [QFP50P900X900X160-48N]  27.72,161.85 270 top
U8  MCP73831  [SOT23-5]  19.97,202.87 180 top
U9  STM32F103CBT6  [QFP50P900X900X160-48N]  85.72,161.85 270 top
U10  MCP73831  [SOT23-5]  77.97,202.87 180 top
U11  STM32F103CBT6  [QFP50P900X900X160-48N]  143.72,161.85 270 top
U12  MCP73831  [SOT23-5]  135.97,202.87 180 top
U$1  3310PANEL  [3310LCD]  41.56,0 0 bottom
U$2  WIRELESS-LORA-RFM95W#SMD  [WIRELESS-LORA-RFM95W#SMD]  28.86,64.01 180 top
U$3  INVERTED_F_ANTENNA+2  [DN007+2]  26.07,103.76 0 bottom
U$4  JST-09-PIN-HORIZONTAL  [JST-09-SMD-HORI-1.0MM]  13.62,0.13 180 top
U$5  [OSHW-LOGO-M]  35.97,83.31 0 top
U$6  CJT1117-3.3-SOT223  [SOT-223]  8.16,85.35 0 top
U$7  3310PANEL  [3310LCD]  99.56,0 0 bottom
U$8  WIRELESS-LORA-RFM95W#SMD  [WIRELESS-LORA-RFM95W#SMD]  86.86,64.01 180 top
U$9  INVERTED_F_ANTENNA+2  [DN007+2]  84.07,103.76 0 bottom
U$10  JST-09-PIN-HORIZONTAL  [JST-09-SMD-HORI-1.0MM]  71.62,0.13 180 top
U$11  [OSHW-LOGO-M]  93.97,83.31 0 top
U$12  CJT1117-3.3-SOT223  [SOT-223]  66.16,85.35 0 top
U$13  3310PANEL  [3310LCD]  157.56,0 0 bottom
U$14  WIRELESS-LORA-RFM95W#SMD  [WIRELESS-LORA-RFM95W#SMD]  144.86,64.01 180 top
U$15  INVERTED_F_ANTENNA+2  [DN007+2]  142.07,103.76 0 bottom
U$16  JST-09-PIN-HORIZONTAL  [JST-09-SMD-HORI-1.0MM]  129.62,0.13 180 top
U$17  [OSHW-LOGO-M]  151.97,83.31 0 top
U$18  CJT1117-3.3-SOT223  [SOT-223]  124.16,85.35 0 top
U$19  3310PANEL  [3310LCD]  41.56,124 0 bottom
U$20  WIRELESS-LORA-RFM95W#SMD  [WIRELESS-LORA-RFM95W#SMD]  28.86,188.01 180 top
U$21  INVERTED_F_ANTENNA+2  [DN007+2]  26.07,227.76 0 bottom
U$22  JST-09-PIN-HORIZONTAL  [JST-09-SMD-HORI-1.0MM]  13.62,124.13 180 top
U$23  [OSHW-LOGO-M]  35.97,207.31 0 top
U$24  CJT1117-3.3-SOT223  [SOT-223]  8.16,209.35 0 top
U$25  3310PANEL  [3310LCD]  99.56,124 0 bottom
U$26  WIRELESS-LORA-RFM95W#SMD  [WIRELESS-LORA-RFM95W#SMD]  86.86,188.01 180 top
U$27  INVERTED_F_ANTENNA+2  [DN007+2]  84.07,227.76 0 bottom
U$28  JST-09-PIN-HORIZONTAL  [JST-09-SMD-HORI-1.0MM]  71.62,124.13 180 top
U$29  [OSHW-LOGO-M]  93.97,207.31 0 top
U$30  CJT1117-3.3-SOT223  [SOT-223]  66.16,209.35 0 top
U$31  3310PANEL  [3310LCD]  157.56,124 0 bottom
U$32  WIRELESS-LORA-RFM95W#SMD  [WIRELESS-LORA-RFM95W#SMD]  144.86,188.01 180 top
U$33  INVERTED_F_ANTENNA+2  [DN007+2]  142.07,227.76 0 bottom
U$34  JST-09-PIN-HORIZONTAL  [JST-09-SMD-HORI-1.0MM]  129.62,124.13 180 top
U$35  [OSHW-LOGO-M]  151.97,207.31 0 top
U$36  CJT1117-3.3-SOT223  [SOT-223]  124.16,209.35 0 top
Y1  8MHz  [CRYSTAL-SMD-5X3.2-4PAD]  28.61,46.83 270 top
Y2  8MHz  [CRYSTAL-SMD-5X3.2-4PAD]  86.61,46.83 270 top
Y3  8MHz  [CRYSTAL-SMD-5X3.2-4PAD]  144.61,46.83 270 top
Y4  8MHz  [CRYSTAL-SMD-5X3.2-4PAD]  28.61,170.83 270 top
Y5  8MHz  [CRYSTAL-SMD-5X3.2-4PAD]  86.61,170.83 270 top
Y6  8MHz  [CRYSTAL-SMD-5X3.2-4PAD]  144.61,170.83 270 top

## Library data of the parts
ANT1-ANT6 = Seeed-Connector
C1-C4 C6-C8 C21 C26-C30 C32-C34 C44 C52-C56 C58-C60 C70 C78-C82 C84-C86 C96 C104-C108 C110-C112 C122 C130-C134 C136-C138 C148 C156 = Seeed-Capacitor; MPN: CC0603KRX5R6BB475
C5 C9-C11 C15 C19 C20 C22 C25 C31 C35-C37 C39 C42 C43 C45 C49 C57 C61-C63 C65 C68 C69 C71 C75 C83 C87-C89 C91 C94 C95 C97 C101 C109 C113-C115 C117 C120 C121 C123 C127 C135 C139-C141 C143 C146 C147 C149 C153 = Seeed-Capacitor; MPN: CC0603KRX7R9BB104
C12 C13 C50 C51 C76 C77 C102 C103 C128 C129 C154 C155 = SparkFun-Capacitors; PROD_ID: CAP-08267
C14 C38 C64 C90 C116 C142 = Seeed-Capacitor; MPN: CC0603KRX5R6BB106
C16 C40 C66 C92 C118 C144 L1-L6 = rcl; SPICEPREFIX: C
C17 C41 C67 C93 C119 C145 = Seeed-Capacitor; MPN: CC0603CRNPO9BN4R7
C18 C23 C24 C46-C48 C72-C74 C98-C100 C124-C126 C150-C152 = Seeed-Capacitor; MPN: TAJB226*016#NJ
D1-D3 D12-D14 D19-D21 D26-D28 D33-D35 D40-D42 = Seeed-Diode; MPN: B5819W
D4-D11 D15-D18 D22-D25 D29-D32 D36-D39 U$1 U$7 U$13 U$19 U$25 U$31 = mastrogippo
FID1-FID18 = SparkFun-Retired
IC1-IC6 = ESP32-PICO-D4_MG; ARROW_PART_NUMBER: ESP32-PICO-D4; DESCRIPTION: ESP32-PICO-D4 module; HEIGHT: mm; MANUFACTURER_NAME: Espressif; MANUFACTURER_PART_NUMBER: ESP32-PICO-D4
J1 J4 J6 J8 J10 J12 = SparkFun-Connectors; PROD_ID: CONN-09505; SF_ID: PRT-08533
J2 J3 J5 J7 J9 J11 TP1-TP36 U$4 U$10 U$16 U$22 U$28 U$34 = SparkFun-Connectors
Q1 Q2 Q4-Q6 Q8-Q10 Q12-Q14 Q16-Q18 Q20-Q22 Q24 = Seeed-Transistor; MPN: CJ2302
Q3 Q7 Q11 Q15 Q19 Q23 = Seeed-Transistor; MPN: FDN340P
R1 R2 R6 R7 R20 R21 R25 R26 R39 R40 R44 R45 R58 R59 R63 R64 R77 R78 R82 R83 R96 R97 R101 R102 = Seeed-Resistor; MPN: RC0603JR-0722RL
R3 R22 R41 R60 R79 R98 = Seeed-Resistor; MPN: RC0603FR-071K5L
R4 R23 R42 R61 R80 R99 = Seeed-Resistor; MPN: RC0603FR-072KL
R5 R9 R11 R16 R18 R19 R24 R28 R30 R36-R38 R43 R47 R49 R55-R57 R62 R66 R68 R74-R76 R81 R85 R87 R93-R95 R100 R104 R106 R112-R114 = Seeed-Resistor; MPN: RC0603FR-0710KL
R8 R27 R46 R65 R84 R103 = Seeed-Resistor; MPN: RC0603JR-0710KL
R10 R29 R48 R67 R86 R105 = rcl; SPICEPREFIX: R
R12-R15 R17 R31-R35 R50-R54 R69-R73 R88-R92 R107-R111 = Seeed-Resistor; MPN: RC0603JR-07100KL
U1 U2 U5 U7 U9 U11 = ST Microelctronics_By_element14_Batch_1; MPN: STM32F103CBT6; OC_FARNELL: 1606327; OC_NEWARK: 11N8296; PACKAGE: QFP-48; SUPPLIER: STMICROELECTRONICS
U3 U4 U6 U8 U10 U12 = SparkFun-IC-Power; PROD_ID: IC-09995
U$2 U$8 U$14 U$20 U$26 U$32 = diy-modules
U$3 U$9 U$15 U$21 U$27 U$33 = antenna
U$5 U$11 U$17 U$23 U$29 U$35 = SparkFun-Aesthetics
U$6 U$12 U$18 U$24 U$30 U$36 = Seeed-IC; MPN: CJT1117-3.3
Y1-Y6 = SparkFun-Clocks; PROD_ID: XTAL-09431

## Nets
+3V1: C32.1 C33.1 C34.1 C35.1 C36.1 C37.1 C38.1 C39.1 C42.1 C43.1 C44.1 C46.+ C48.+ D12.- D13.- IC2.1 IC2.3 IC2.4 IC2.19 IC2.37 IC2.43 IC2.46 R22.2 R26.2 R27.2 R30.1 R36.2 TP9.P$1 U1.1 U1.9 U1.24 U1.36 U1.48 U$7.BUZ2 U$7.MOT2 U$7.P$8 U$8.B4 U$10.9 U$12.2 U$12.TER
+3V2: C58.1 C59.1 C60.1 C61.1 C62.1 C63.1 C64.1 C65.1 C68.1 C69.1 C70.1 C72.+ C74.+ D19.- D20.- IC3.1 IC3.3 IC3.4 IC3.19 IC3.37 IC3.43 IC3.46 R41.2 R45.2 R46.2 R49.1 R55.2 TP15.P$1 U5.1 U5.9 U5.24 U5.36 U5.48 U$13.BUZ2 U$13.MOT2 U$13.P$8 U$14.B4 U$16.9 U$18.2 U$18.TER
+3V3: C6.1 C7.1 C8.1 C9.1 C10.1 C11.1 C14.1 C15.1 C18.+ C19.1 C20.1 C21.1 C24.+ D1.- D2.- IC1.1 IC1.3 IC1.4 IC1.19 IC1.37 IC1.43 IC1.46 R3.2 R7.2 R8.2 R11.1 R18.2 TP3.P$1 U2.1 U2.9 U2.24 U2.36 U2.48 U$1.BUZ2 U$1.MOT2 U$1.P$8 U$2.B4 U$4.9 U$6.2 U$6.TER
+3V4: C84.1 C85.1 C86.1 C87.1 C88.1 C89.1 C90.1 C91.1 C94.1 C95.1 C96.1 C98.+ C100.+ D26.- D27.- IC4.1 IC4.3 IC4.4 IC4.19 IC4.37 IC4.43 IC4.46 R60.2 R64.2 R65.2 R68.1 R74.2 TP21.P$1 U7.1 U7.9 U7.24 U7.36 U7.48 U$19.BUZ2 U$19.MOT2 U$19.P$8 U$20.B4 U$22.9 U$24.2 U$24.TER
+3V5: C110.1 C111.1 C112.1 C113.1 C114.1 C115.1 C116.1 C117.1 C120.1 C121.1 C122.1 C124.+ C126.+ D33.- D34.- IC5.1 IC5.3 IC5.4 IC5.19 IC5.37 IC5.43 IC5.46 R79.2 R83.2 R84.2 R87.1 R93.2 TP27.P$1 U9.1 U9.9 U9.24 U9.36 U9.48 U$25.BUZ2 U$25.MOT2 U$25.P$8 U$26.B4 U$28.9 U$30.2 U$30.TER
+3V6: C136.1 C137.1 C138.1 C139.1 C140.1 C141.1 C142.1 C143.1 C146.1 C147.1 C148.1 C150.+ C152.+ D40.- D41.- IC6.1 IC6.3 IC6.4 IC6.19 IC6.37 IC6.43 IC6.46 R98.2 R102.2 R103.2 R106.1 R112.2 TP33.P$1 U11.1 U11.9 U11.24 U11.36 U11.48 U$31.BUZ2 U$31.MOT2 U$31.P$8 U$32.B4 U$34.9 U$36.2 U$36.TER
+5V: C2.1 D3.+ J1.VBUS Q3.1 R5.2 R14.2 U3.4
+5V1: C28.1 D14.+ J4.VBUS Q7.1 R24.2 R33.2 U4.4
+5V2: C54.1 D21.+ J6.VBUS Q11.1 R43.2 R52.2 U6.4
+5V3: C80.1 D28.+ J8.VBUS Q15.1 R62.2 R71.2 U8.4
+5V4: C106.1 D35.+ J10.VBUS Q19.1 R81.2 R90.2 U10.4
+5V5: C132.1 D42.+ J12.VBUS Q23.1 R100.2 R109.2 U12.4
ANT: J3.1 R10.1
ANT1: J2.1 R29.1
ANT2: J5.1 R48.1
ANT3: J7.1 R67.1
ANT4: J9.1 R86.1
ANT5: J11.1 R105.1
BOOT0: R9.2 U2.44 U$4.4
BOOT1: U2.20
BOOT2: U1.20
BOOT3: R28.2 U1.44 U$10.4
BOOT4: U5.20
BOOT5: R47.2 U5.44 U$16.4
BOOT6: U7.20
BOOT7: R66.2 U7.44 U$22.4
BOOT8: U9.20
BOOT9: R85.2 U9.44 U$28.4
BOOT10: U11.20
BOOT11: R104.2 U11.44 U$34.4
BUZ: C26.1 U2.43
BUZ1: C52.1 U1.43
BUZ2: C78.1 U5.43
BUZ3: C104.1 U7.43
BUZ4: C130.1 U9.43
BUZ5: C156.1 U11.43
C_STAT: R16.1 U2.25
C_STAT1: R38.1 U1.25
C_STAT2: R57.1 U5.25
C_STAT3: R76.1 U7.25
C_STAT4: R95.1 U9.25
C_STAT5: R114.1 U11.25
CS_LCD: IC1.12 U$1.P$4
CS_LCD1: IC2.12 U$7.P$4
CS_LCD2: IC3.12 U$13.P$4
CS_LCD3: IC4.12 U$19.P$4
CS_LCD4: IC5.12 U$25.P$4
CS_LCD5: IC6.12 U$31.P$4
CS_LORA: IC1.16 U$2.A5
CS_LORA1: IC2.16 U$8.A5
CS_LORA2: IC3.16 U$14.A5
CS_LORA3: IC4.16 U$20.A5
CS_LORA4: IC5.16 U$26.A5
CS_LORA5: IC6.16 U$32.A5
D+: R1.2 R3.1 U2.33
D+1: R20.2 R22.1 U1.33
D+2: R39.2 R41.1 U5.33
D+3: R58.2 R60.1 U7.33
D+4: R77.2 R79.1 U9.33
D+5: R96.2 R98.1 U11.33
D-: R2.2 U2.32
D-1: R21.2 U1.32
D-2: R40.2 U5.32
D-3: R59.2 U7.32
D-4: R78.2 U9.32
D-5: R97.2 U11.32
D_E_LCD: IC1.17 U$1.P$5
D_E_LCD1: IC2.17 U$7.P$5
D_E_LCD2: IC3.17 U$13.P$5
D_E_LCD3: IC4.17 U$19.P$5
D_E_LCD4: IC5.17 U$25.P$5
D_E_LCD5: IC6.17 U$31.P$5
ESP_B0: IC1.23 R11.2 U2.40
ESP_B1: IC2.23 R30.2 U1.40
ESP_B2: IC3.23 R49.2 U5.40
ESP_B3: IC4.23 R68.2 U7.40
ESP_B4: IC5.23 R87.2 U9.40
ESP_B5: IC6.23 R106.2 U11.40
ESP_RST: C25.1 IC1.9 R6.1 R18.1
ESP_RST1: C49.1 IC2.9 R25.1 R36.1
ESP_RST2: C75.1 IC3.9 R44.1 R55.1
ESP_RST3: C101.1 IC4.9 R63.1 R74.1
ESP_RST4: C127.1 IC5.9 R82.1 R93.1
ESP_RST5: C153.1 IC6.9 R101.1 R112.1
ESP_RX: IC1.40 U2.21
ESP_RX1: IC2.40 U1.21
ESP_RX2: IC3.40 U5.21
ESP_RX3: IC4.40 U7.21
ESP_RX4: IC5.40 U9.21
ESP_RX5: IC6.40 U11.21
ESP_TX: IC1.41 U2.22
ESP_TX1: IC2.41 U1.22
ESP_TX2: IC3.41 U5.22
ESP_TX3: IC4.41 U7.22
ESP_TX4: IC5.41 U9.22
ESP_TX5: IC6.41 U11.22
GND: ANT1.GND1 ANT1.GND2 C1.1 C2.2 C3.2 C4.2 C5.2 C6.2 C7.2 C8.2 C9.2 C10.2 C11.2 C12.1 C13.1 C14.2 C15.2 C16.2 C18.- C19.2 C20.2 C21.2 C22.2 C23.- C24.- C25.2 IC1.49 J1.GND J1.MT1 J1.MT2 J1.P$1 J1.P$2 L1.2 Q1.2 Q2.2 Q4.2 R4.1 R5.1 R9.1 R13.1 R15.1 R17.1 R19.2 U2.8 U2.23 U2.35 U2.47 U3.2 U$1.BATT- U$1.G1 U$1.G2 U$1.P$3 U$1.PW2A U$1.PW2B U$1.SPK2 U$2.A1 U$2.A8 U$2.B7 U$3.GND U$3.GND@1 U$4.1 U$4.M1 U$4.M2 U$6.1
GND1: ANT2.GND1 ANT2.GND2 C27.1 C28.2 C29.2 C30.2 C31.2 C32.2 C33.2 C34.2 C35.2 C36.2 C37.2 C38.2 C39.2 C40.2 C42.2 C43.2 C44.2 C45.2 C46.- C47.- C48.- C49.2 C50.1 C51.1 IC2.49 J4.GND J4.MT1 J4.MT2 J4.P$1 J4.P$2 L2.2 Q5.2 Q6.2 Q8.2 R23.1 R24.1 R28.1 R32.1 R34.1 R35.1 R37.2 U1.8 U1.23 U1.35 U1.47 U4.2 U$7.BATT- U$7.G1 U$7.G2 U$7.P$3 U$7.PW2A U$7.PW2B U$7.SPK2 U$8.A1 U$8.A8 U$8.B7 U$9.GND U$9.GND@1 U$10.1 U$10.M1 U$10.M2 U$12.1
GND2: ANT3.GND1 ANT3.GND2 C53.1 C54.2 C55.2 C56.2 C57.2 C58.2 C59.2 C60.2 C61.2 C62.2 C63.2 C64.2 C65.2 C66.2 C68.2 C69.2 C70.2 C71.2 C72.- C73.- C74.- C75.2 C76.1 C77.1 IC3.49 J6.GND J6.MT1 J6.MT2 J6.P$1 J6.P$2 L3.2 Q9.2 Q10.2 Q12.2 R42.1 R43.1 R47.1 R51.1 R53.1 R54.1 R56.2 U5.8 U5.23 U5.35 U5.47 U6.2 U$13.BATT- U$13.G1 U$13.G2 U$13.P$3 U$13.PW2A U$13.PW2B U$13.SPK2 U$14.A1 U$14.A8 U$14.B7 U$15.GND U$15.GND@1 U$16.1 U$16.M1 U$16.M2 U$18.1
GND3: ANT4.GND1 ANT4.GND2 C79.1 C80.2 C81.2 C82.2 C83.2 C84.2 C85.2 C86.2 C87.2 C88.2 C89.2 C90.2 C91.2 C92.2 C94.2 C95.2 C96.2 C97.2 C98.- C99.- C100.- C101.2 C102.1 C103.1 IC4.49 J8.GND J8.MT1 J8.MT2 J8.P$1 J8.P$2 L4.2 Q13.2 Q14.2 Q16.2 R61.1 R62.1 R66.1 R70.1 R72.1 R73.1 R75.2 U7.8 U7.23 U7.35 U7.47 U8.2 U$19.BATT- U$19.G1 U$19.G2 U$19.P$3 U$19.PW2A U$19.PW2B U$19.SPK2 U$20.A1 U$20.A8 U$20.B7 U$21.GND U$21.GND@1 U$22.1 U$22.M1 U$22.M2 U$24.1
GND4: ANT5.GND1 ANT5.GND2 C105.1 C106.2 C107.2 C108.2 C109.2 C110.2 C111.2 C112.2 C113.2 C114.2 C115.2 C116.2 C117.2 C118.2 C120.2 C121.2 C122.2 C123.2 C124.- C125.- C126.- C127.2 C128.1 C129.1 IC5.49 J10.GND J10.MT1 J10.MT2 J10.P$1 J10.P$2 L5.2 Q17.2 Q18.2 Q20.2 R80.1 R81.1 R85.1 R89.1 R91.1 R92.1 R94.2 U9.8 U9.23 U9.35 U9.47 U10.2 U$25.BATT- U$25.G1 U$25.G2 U$25.P$3 U$25.PW2A U$25.PW2B U$25.SPK2 U$26.A1 U$26.A8 U$26.B7 U$27.GND U$27.GND@1 U$28.1 U$28.M1 U$28.M2 U$30.1
GND5: ANT6.GND1 ANT6.GND2 C131.1 C132.2 C133.2 C134.2 C135.2 C136.2 C137.2 C138.2 C139.2 C140.2 C141.2 C142.2 C143.2 C144.2 C146.2 C147.2 C148.2 C149.2 C150.- C151.- C152.- C153.2 C154.1 C155.1 IC6.49 J12.GND J12.MT1 J12.MT2 J12.P$1 J12.P$2 L6.2 Q21.2 Q22.2 Q24.2 R99.1 R100.1 R104.1 R108.1 R110.1 R111.1 R113.2 U11.8 U11.23 U11.35 U11.47 U12.2 U$31.BATT- U$31.G1 U$31.G2 U$31.P$3 U$31.PW2A U$31.PW2B U$31.SPK2 U$32.A1 U$32.A8 U$32.B7 U$33.GND U$33.GND@1 U$34.1 U$34.M1 U$34.M2 U$36.1
IO1: IC2.6
IO2: IC2.7
IO3: IC2.8
IO4: IC2.5
IO5: IC1.34 TP1.P$1
IO6: IC2.10
IO7: IC2.34 TP7.P$1
IO8: IC2.35 TP8.P$1
IO9: IC3.6
IO10: IC3.7
IO11: IC3.8
IO12: IC3.5
IO13: IC3.10
IO14: IC3.34 TP13.P$1
IO15: IC3.35 TP14.P$1
IO16: IC4.6
IO17: IC4.7
IO18: IC1.35 TP2.P$1
IO19: IC4.8
IO20: IC4.5
IO21: IC4.10
IO22: IC4.34 TP19.P$1
IO23: IC4.35 TP20.P$1
IO24: IC5.6
IO25: IC5.7
IO26: IC5.8
IO27: IC5.5
IO28: IC5.10
IO29: IC5.34 TP25.P$1
IO30: IC5.35 TP26.P$1
IO31: IC6.6
IO32: IC6.7
IO33: IC6.8
IO34: IC1.10
IO35: IC6.5
IO36: IC1.5
IO37: IC1.6
IO38: IC1.7
IO39: IC1.8
IO40: IC6.10
IO41: IC6.34 TP31.P$1
IO42: IC6.35 TP32.P$1
KP: U2.10 U$1.PW1A U$1.PW1B
KP1: U1.10 U$7.PW1A U$7.PW1B
KP2: U5.10 U$13.PW1A U$13.PW1B
KP3: U7.10 U$19.PW1A U$19.PW1B
KP4: U9.10 U$25.PW1A U$25.PW1B
KP5: U11.10 U$31.PW1A U$31.PW1B
KX1: U2.11 U$1.B1I U$1.B2I U$1.B3I U$1.BCI
KX2: U2.12 U$1.B4I U$1.B5I U$1.B6I U$1.BMI
KX3: U2.13 U$1.B7I U$1.B8I U$1.B9I U$1.BDI
KX4: U2.14 U$1.B0I U$1.BAI U$1.BSI U$1.BUI
KX5: U1.11 U$7.B1I U$7.B2I U$7.B3I U$7.BCI
KX6: U1.12 U$7.B4I U$7.B5I U$7.B6I U$7.BMI
KX7: U1.13 U$7.B7I U$7.B8I U$7.B9I U$7.BDI
KX8: U1.14 U$7.B0I U$7.BAI U$7.BSI U$7.BUI
KX9: U5.11 U$13.B1I U$13.B2I U$13.B3I U$13.BCI
KX10: U5.12 U$13.B4I U$13.B5I U$13.B6I U$13.BMI
KX11: U5.13 U$13.B7I U$13.B8I U$13.B9I U$13.BDI
KX12: U5.14 U$13.B0I U$13.BAI U$13.BSI U$13.BUI
KX13: U7.11 U$19.B1I U$19.B2I U$19.B3I U$19.BCI
KX14: U7.12 U$19.B4I U$19.B5I U$19.B6I U$19.BMI
KX15: U7.13 U$19.B7I U$19.B8I U$19.B9I U$19.BDI
KX16: U7.14 U$19.B0I U$19.BAI U$19.BSI U$19.BUI
KX17: U9.11 U$25.B1I U$25.B2I U$25.B3I U$25.BCI
KX18: U9.12 U$25.B4I U$25.B5I U$25.B6I U$25.BMI
KX19: U9.13 U$25.B7I U$25.B8I U$25.B9I U$25.BDI
KX20: U9.14 U$25.B0I U$25.BAI U$25.BSI U$25.BUI
KX21: U11.11 U$31.B1I U$31.B2I U$31.B3I U$31.BCI
KX22: U11.12 U$31.B4I U$31.B5I U$31.B6I U$31.BMI
KX23: U11.13 U$31.B7I U$31.B8I U$31.B9I U$31.BDI
KX24: U11.14 U$31.B0I U$31.BAI U$31.BSI U$31.BUI
KY1: U2.15 U$1.B1O U$1.B4O U$1.B7O U$1.BAO
KY2: U2.16 U$1.B0O U$1.B2O U$1.B5O U$1.B8O
KY3: U2.17 U$1.B3O U$1.B6O U$1.B9O U$1.BSO
KY4: U2.29 U$1.BCO U$1.BDO U$1.BMO U$1.BUO
KY5: U1.15 U$7.B1O U$7.B4O U$7.B7O U$7.BAO
KY6: U1.16 U$7.B0O U$7.B2O U$7.B5O U$7.B8O
KY7: U1.17 U$7.B3O U$7.B6O U$7.B9O U$7.BSO
KY8: U1.29 U$7.BCO U$7.BDO U$7.BMO U$7.BUO
KY9: U5.15 U$13.B1O U$13.B4O U$13.B7O U$13.BAO
KY10: U5.16 U$13.B0O U$13.B2O U$13.B5O U$13.B8O
KY11: U5.17 U$13.B3O U$13.B6O U$13.B9O U$13.BSO
KY12: U5.29 U$13.BCO U$13.BDO U$13.BMO U$13.BUO
KY13: U7.15 U$19.B1O U$19.B4O U$19.B7O U$19.BAO
KY14: U7.16 U$19.B0O U$19.B2O U$19.B5O U$19.B8O
KY15: U7.17 U$19.B3O U$19.B6O U$19.B9O U$19.BSO
KY16: U7.29 U$19.BCO U$19.BDO U$19.BMO U$19.BUO
KY17: U9.15 U$25.B1O U$25.B4O U$25.B7O U$25.BAO
KY18: U9.16 U$25.B0O U$25.B2O U$25.B5O U$25.B8O
KY19: U9.17 U$25.B3O U$25.B6O U$25.B9O U$25.BSO
KY20: U9.29 U$25.BCO U$25.BDO U$25.BMO U$25.BUO
KY21: U11.15 U$31.B1O U$31.B4O U$31.B7O U$31.BAO
KY22: U11.16 U$31.B0O U$31.B2O U$31.B5O U$31.B8O
KY23: U11.17 U$31.B3O U$31.B6O U$31.B9O U$31.BSO
KY24: U11.29 U$31.BCO U$31.BDO U$31.BMO U$31.BUO
LED: Q4.1 U2.46
LED1: Q8.1 U1.46
LED2: Q12.1 U5.46
LED3: Q16.1 U7.46
LED4: Q20.1 U9.46
LED5: Q24.1 U11.46
MISO: IC1.14 U$2.A2
MISO1: IC2.14 U$8.A2
MISO2: IC3.14 U$14.A2
MISO3: IC4.14 U$20.A2
MISO4: IC5.14 U$26.A2
MISO5: IC6.14 U$32.A2
MOSI: IC1.36 U$1.P$6 U$2.A3
MOSI1: IC2.36 U$7.P$6 U$8.A3
MOSI2: IC3.36 U$13.P$6 U$14.A3
MOSI3: IC4.36 U$19.P$6 U$20.A3
MOSI4: IC5.36 U$25.P$6 U$26.A3
MOSI5: IC6.36 U$31.P$6 U$32.A3
MOT: Q2.1 R17.2 U2.42
MOT1: Q6.1 R35.2 U1.42
MOT2: Q10.1 R54.2 U5.42
MOT3: Q14.1 R73.2 U7.42
MOT4: Q18.1 R92.2 U9.42
MOT5: Q22.1 R111.2 U11.42
N$1: C1.2 U$1.P$2
N$2: C16.1 C17.1 U$3.FEED
N$3: C17.2 IC1.2 L1.1
N$4: ANT1.D R10.2 U$2.B8
N$5: J1.D+ R1.1
N$6: J1.D- R2.1
N$7: R16.2 U3.1
N$8: C26.2 Q1.1 R19.1
N$9: D1.+ Q1.3 U$1.BUZ1
N$10: C13.2 U2.5 Y1.3
N$11: TP4.P$1 U$1.BTEMP
N$12: D2.+ Q2.3 U$1.MOT1
N$13: R4.2 U3.5
N$14: C4.1 C5.1 C23.+ D3.- Q3.2 U$6.3
N$15: C12.2 U2.6 Y1.1
N$16: U2.18 U$4.8
N$17: TP6.P$1 U$1.SPK1
N$18: C27.2 U$7.P$2
N$19: R6.2 U2.41
N$20: U2.28
N$21: TP5.P$1 U$1.B_SI
N$22: U2.38
N$23: D4.C D5.C D6.C D7.C Q4.3
N$24: D4.A D5.A D6.A D7.A R7.1
N$26: C22.1 R12.1 R13.2 U2.19
N$27: J4.D+ R20.1
N$28: J4.D- R21.1
N$29: D12.+ Q5.3 U$7.BUZ1
N$30: D13.+ Q6.3 U$7.MOT1
N$31: R23.2 U4.5
N$32: C30.1 C31.1 C47.+ D14.- Q7.2 U$12.3
N$33: C40.1 C41.1 U$9.FEED
N$34: C41.2 IC2.2 L2.1
N$35: R25.2 U1.41
N$36: D8.C D9.C D10.C D11.C Q8.3
N$37: D8.A D9.A D10.A D11.A R26.1
N$39: U1.28
N$40: ANT2.D R29.2 U$8.B8
N$41: U1.18 U$10.8
N$42: C45.1 R31.1 R32.2 U1.19
N$43: U1.38
N$44: TP10.P$1 U$7.BTEMP
N$45: TP11.P$1 U$7.B_SI
N$46: TP12.P$1 U$7.SPK1
N$47: C51.2 U1.5 Y2.3
N$48: C50.2 U1.6 Y2.1
N$49: C52.2 Q5.1 R37.1
N$50: R38.2 U4.1
N$51: C53.2 U$13.P$2
N$52: J6.D+ R39.1
N$53: J6.D- R40.1
N$54: D19.+ Q9.3 U$13.BUZ1
N$55: D20.+ Q10.3 U$13.MOT1
N$56: R42.2 U6.5
N$57: C56.1 C57.1 C73.+ D21.- Q11.2 U$18.3
N$58: C66.1 C67.1 U$15.FEED
N$59: C67.2 IC3.2 L3.1
N$60: R44.2 U5.41
N$61: D15.C D16.C D17.C D18.C Q12.3
N$62: D15.A D16.A D17.A D18.A R45.1
N$64: U5.28
N$65: ANT3.D R48.2 U$14.B8
N$66: U5.18 U$16.8
N$67: C71.1 R50.1 R51.2 U5.19
N$68: U5.38
N$69: TP16.P$1 U$13.BTEMP
N$70: TP17.P$1 U$13.B_SI
N$71: TP18.P$1 U$13.SPK1
N$72: C77.2 U5.5 Y3.3
N$73: C76.2 U5.6 Y3.1
N$74: C78.2 Q9.1 R56.1
N$75: R57.2 U6.1
N$76: C79.2 U$19.P$2
N$77: J8.D+ R58.1
N$78: J8.D- R59.1
N$79: D26.+ Q13.3 U$19.BUZ1
N$80: D27.+ Q14.3 U$19.MOT1
N$81: R61.2 U8.5
N$82: C82.1 C83.1 C99.+ D28.- Q15.2 U$24.3
N$83: C92.1 C93.1 U$21.FEED
N$84: C93.2 IC4.2 L4.1
N$85: R63.2 U7.41
N$86: D22.C D23.C D24.C D25.C Q16.3
N$87: D22.A D23.A D24.A D25.A R64.1
N$89: U7.28
N$90: ANT4.D R67.2 U$20.B8
N$91: U7.18 U$22.8
N$92: C97.1 R69.1 R70.2 U7.19
N$93: U7.38
N$94: TP22.P$1 U$19.BTEMP
N$95: TP23.P$1 U$19.B_SI
N$96: TP24.P$1 U$19.SPK1
N$97: C103.2 U7.5 Y4.3
N$98: C102.2 U7.6 Y4.1
N$99: C104.2 Q13.1 R75.1
N$100: R76.2 U8.1
N$101: C105.2 U$25.P$2
N$102: J10.D+ R77.1
N$103: J10.D- R78.1
N$104: D33.+ Q17.3 U$25.BUZ1
N$105: D34.+ Q18.3 U$25.MOT1
N$106: R80.2 U10.5
N$107: C108.1 C109.1 C125.+ D35.- Q19.2 U$30.3
N$108: C118.1 C119.1 U$27.FEED
N$109: C119.2 IC5.2 L5.1
N$110: R82.2 U9.41
N$111: D29.C D30.C D31.C D32.C Q20.3
N$112: D29.A D30.A D31.A D32.A R83.1
N$114: U9.28
N$115: ANT5.D R86.2 U$26.B8
N$116: U9.18 U$28.8
N$117: C123.1 R88.1 R89.2 U9.19
N$118: U9.38
N$119: TP28.P$1 U$25.BTEMP
N$120: TP29.P$1 U$25.B_SI
N$121: TP30.P$1 U$25.SPK1
N$122: C129.2 U9.5 Y5.3
N$123: C128.2 U9.6 Y5.1
N$124: C130.2 Q17.1 R94.1
N$125: R95.2 U10.1
N$126: C131.2 U$31.P$2
N$127: J12.D+ R96.1
N$128: J12.D- R97.1
N$129: D40.+ Q21.3 U$31.BUZ1
N$130: D41.+ Q22.3 U$31.MOT1
N$131: R99.2 U12.5
N$132: C134.1 C135.1 C151.+ D42.- Q23.2 U$36.3
N$133: C144.1 C145.1 U$33.FEED
N$134: C145.2 IC6.2 L6.1
N$135: R101.2 U11.41
N$136: D36.C D37.C D38.C D39.C Q24.3
N$137: D36.A D37.A D38.A D39.A R102.1
N$139: U11.28
N$140: ANT6.D R105.2 U$32.B8
N$141: U11.18 U$34.8
N$142: C149.1 R107.1 R108.2 U11.19
N$143: U11.38
N$144: TP34.P$1 U$31.BTEMP
N$145: TP35.P$1 U$31.B_SI
N$146: TP36.P$1 U$31.SPK1
N$147: C155.2 U11.5 Y6.3
N$148: C154.2 U11.6 Y6.1
N$149: C156.2 Q21.1 R113.1
N$150: R114.2 U12.1
NRST: R8.1 U2.7 U$4.7
NRST1: R27.1 U1.7 U$10.7
NRST2: R46.1 U5.7 U$16.7
NRST3: R65.1 U7.7 U$22.7
NRST4: R84.1 U9.7 U$28.7
NRST5: R103.1 U11.7 U$34.7
RES_LCD: IC1.13 U$1.P$1
RES_LCD1: IC2.13 U$7.P$1
RES_LCD2: IC3.13 U$13.P$1
RES_LCD3: IC4.13 U$19.P$1
RES_LCD4: IC5.13 U$25.P$1
RES_LCD5: IC6.13 U$31.P$1
RST_LORA: IC1.15 U$2.A6
RST_LORA1: IC2.15 U$8.A6
RST_LORA2: IC3.15 U$14.A6
RST_LORA3: IC4.15 U$20.A6
RST_LORA4: IC5.15 U$26.A6
RST_LORA5: IC6.15 U$32.A6
S_RX: U2.31 U$4.2
S_RX1: U1.31 U$10.2
S_RX2: U5.31 U$16.2
S_RX3: U7.31 U$22.2
S_RX4: U9.31 U$28.2
S_RX5: U11.31 U$34.2
S_TX: U2.30 U$4.3
S_TX1: U1.30 U$10.3
S_TX2: U5.30 U$16.3
S_TX3: U7.30 U$22.3
S_TX4: U9.30 U$28.3
S_TX5: U11.30 U$34.3
SCLK: IC1.38 U$1.P$7 U$2.A4
SCLK1: IC2.38 U$7.P$7 U$8.A4
SCLK2: IC3.38 U$13.P$7 U$14.A4
SCLK3: IC4.38 U$19.P$7 U$20.A4
SCLK4: IC5.38 U$25.P$7 U$26.A4
SCLK5: IC6.38 U$31.P$7 U$32.A4
SWCLK: U2.37 U$4.5
SWCLK1: U1.37 U$10.5
SWCLK2: U5.37 U$16.5
SWCLK3: U7.37 U$22.5
SWCLK4: U9.37 U$28.5
SWCLK5: U11.37 U$34.5
SWDIO: U2.34 U$4.6
SWDIO1: U1.34 U$10.6
SWDIO2: U5.34 U$16.6
SWDIO3: U7.34 U$22.6
SWDIO4: U9.34 U$28.6
SWDIO5: U11.34 U$34.6
USB_PRES: R14.1 R15.2 U2.39
USB_PRES1: R33.1 R34.2 U1.39
USB_PRES2: R52.1 R53.2 U5.39
USB_PRES3: R71.1 R72.2 U7.39
USB_PRES4: R90.1 R91.2 U9.39
USB_PRES5: R109.1 R110.2 U11.39
VBAT: C3.1 Q3.3 R12.2 U3.3 U$1.BATT+
VBAT1: C29.1 Q7.3 R31.2 U4.3 U$7.BATT+
VBAT2: C55.1 Q11.3 R50.2 U6.3 U$13.BATT+
VBAT3: C81.1 Q15.3 R69.2 U8.3 U$19.BATT+
VBAT4: C107.1 Q19.3 R88.2 U10.3 U$25.BATT+
VBAT5: C133.1 Q23.3 R107.2 U12.3 U$31.BATT+

## Tracks (layer width: path | path; a pad name or v marks a point on that pad's centre or on a via)
+3V1  (via drill 0.3, 0.35)
  Top 0.152: 81.27,34.88 81.27,34.67 | R30.1 94.1,90.87 v93.85,90.87 93.59,90.62 R36.2 | U$8.B4 79,63.01 78.99,62.99 | 83.18,73.66 C35.1 84.96,73.41 | C34.1 84.92,73.41 | 85,73.24 84.96,72.39
  Top 0.2: 60.57,28.2 60.83,28.46
  Top 0.203: R27.2 77.97,44.29 77.97,49.57 R26.2 | 60.57,30.86 60.7,30.86 | U1.48 89.93,40.92 90.04,41.02
  Top 0.254: U1.1 88.46,43.23 88.26,43.44 v87.75,43.44 | 81.91,43.69 v81.65,43.44 | U1.9 84.47,42.97 83.68,43.76 v83.45,43.76
  Top 0.305: U1.24 81.32,34.93 | 81.32,34.93 80.77,34.93 | 81.32,34.93 81.27,34.88 | 90.04,41.02 90.04,41.78 89.4,42.42 89.22,42.62 | IC2.1 82.98,97.14 82.98,97.97 | U1.36 88.46,32.08 v88.39,32.01 | 89.22,42.62 89.07,42.62 88.46,43.23 | C36.1 89.22,43.42 89.22,42.62
  Top 0.33: IC2.3 IC2.4 82.73,95.51 82.52,95.3 82.52,94.9 82.34,94.72 82.29,94.72 | IC2.37 89.51,97.92 v89.91,97.92 | IC2.43 86.15,98.35 | 86.15,98.35 v86.23,98.53 | IC2.46 84.65,98.25 84.7,98.3 | 84.7,98.3 86.08,98.3 86.15,98.35 | 82.98,97.97 83.31,98.3 84.7,98.3
  Top 0.356: IC2.19 86.65,90.28 86.99,89.94 87.24,89.94 | C42.1 87.24,89.58 87.24,89.94 | 87.24,89.94 v87.82,89.94
  Top 0.406: 60.57,30.86 60.57,28.2
  Top 0.457: 82.29,94.72 82.11,94.54 81.71,94.13 C38.1 80.88,93.83 C39.1
  Top 0.508: v87.09,40.64 v87.09,35.21 | v88.39,32.01 87.58,31.2 R22.2 | C37.1 81.27,34.67 81.65,34.67 v81.65,34.42 | 64.38,23.62 60.83,27.18 60.83,28.46 | D13.- 60.83,30.1 | C48.+ 74.67,47.75 74.8,47.88
  Top 0.61: v82.16,94.49 82.11,94.54 | U$10.9 69.43,8.41 66.92,10.92 | TP9.P$1 94.67,90.87 v93.85,90.87 | v76.6,12.78 74.95,12.78 74.16,13.57 v74.16,15.11 | v72,15.11 70.35,15.11 67.81,12.57 63.75,12.57 63.68,12.51 | U$12.TER 66.73,88.52 68.74,86.5 68.84,86.5 | U$12.2 66.16,81.43 66.03,81.3 C32.1
  Top 0.813: 64.38,23.62 U$7.MOT2 64.38,15.37 64,14.99 v64,14.61 | 75.11,90.87 v75.5,90.87 | v81.65,43.44 81.65,48.64 80.01,50.29 79.11,50.29 78.31,49.9 77.97,49.57 | v62.99,13.21 63.68,12.51 65.27,10.92 66.92,10.92 | 78.99,62.99 81.65,62.99 83.37,61.28 83.37,61.15 | C44.1 92.07,97.54 91.69,97.92 v89.91,97.92 | v86.23,98.53 86.23,98.51 C43.1
  Top 1.016: D12.- 85.74,15.01 v85.59,14.86 86.48,15.75 91.51,15.75 U$7.BUZ2
  Top 1.27: U$12.2 66.16,83.82 68.84,86.5 71.75,89.41 C33.1 75.47,91.31 | 75.47,91.31 75.47,92.04 C46.+ | v75.5,90.87 75.5,91.29 75.47,91.31 | 66.16,81.43 66.16,75.19 67.94,73.41 84.92,73.41 84.96,73.41 84.96,72.39 84.96,62.74 83.37,61.15 82.29,60.07 82.29,56.01 81.27,54.99 80,54.99 79.11,54.1 79.11,50.29 76.71,47.88 74.8,47.88 61.72,47.88 60.83,46.99 60.83,30.1 60.83,28.46
  Bottom 0.33: v89.91,97.92 89.4,98.43 89.4,98.81 89.02,99.19 88.26,99.19 87.24,98.17 86.48,98.17 v86.23,98.53
  Bottom 0.508: v87.75,43.44 87.09,43.44 v87.09,40.64 | v81.65,34.42 82.16,34.16 87.24,34.16 | v87.09,35.21 87.24,35.05 87.24,34.16 | 87.24,34.16 88.39,33.02 v88.39,32.01
  Bottom 0.61: v89.91,97.92 92.07,97.92 92.7,97.28 92.7,91.44 | v86.23,98.53 86.23,95.51 85.21,94.49 v82.16,94.49 77.72,94.49 76.19,92.97 76.19,91.57 v75.5,90.87 74.67,90.04 74.67,88.5 U$7.P$8 | 92.7,91.44 91.43,90.17 88.05,90.17 v87.82,89.94 | 92.7,91.44 93.21,90.87 v93.85,90.87 | v85.59,14.86 85.59,14.73 83.66,12.8 v76.6,12.78 | v74.16,15.11 v72,15.11 | 81.78,43.46 v81.65,43.44 83.22,43.44 83.51,43.73 83.48,43.73 | 83.48,43.73 v83.45,43.76 | 83.48,43.73 83.78,43.44 87.09,43.44
  Bottom 0.813: v64,14.61 62.99,13.59 v62.99,13.21
+3V2  (via drill 0.3, 0.35)
  Top 0.152: 139.27,34.88 139.27,34.67 | R49.1 152.1,90.87 v151.85,90.87 151.59,90.62 R55.2 | U$14.B4 137,63.01 136.99,62.99 | 141.18,73.66 C61.1 142.96,73.41 | C60.1 142.92,73.41 | 143,73.24 142.96,72.39
  Top 0.2: 118.57,28.2 118.83,28.46
  Top 0.203: R46.2 135.97,44.29 135.97,49.57 R45.2 | 118.57,30.86 118.7,30.86 | U5.48 147.93,40.92 148.04,41.02
  Top 0.254: U5.1 146.46,43.23 146.26,43.44 v145.75,43.44 | 139.91,43.69 v139.65,43.44 | U5.9 142.47,42.97 141.68,43.76 v141.45,43.76
  Top 0.305: U5.24 139.32,34.93 | 139.32,34.93 138.77,34.93 | 139.32,34.93 139.27,34.88 | 148.04,41.02 148.04,41.78 147.4,42.42 147.22,42.62 | IC3.1 140.98,97.14 140.98,97.97 | U5.36 146.46,32.08 v146.39,32.01 | 147.22,42.62 147.07,42.62 146.46,43.23 | C62.1 147.22,43.42 147.22,42.62